# Altium PCB all_Masterboard_2020.PcbDoc
Units mm, origin at the board's own origin, x right, y up, seen from the top; angles counter-clockwise.
Board outline 150 x 100 mm, 8 copper layers (Top Layer, GND1, SIG1, SIG2, GND2, SIG3, PWR, Bottom Layer), stack 1.535 mm thick; 173 components, 178 nets, 1386 pads, 5 vias.
Unrouted connection lines stored in the file: 631.
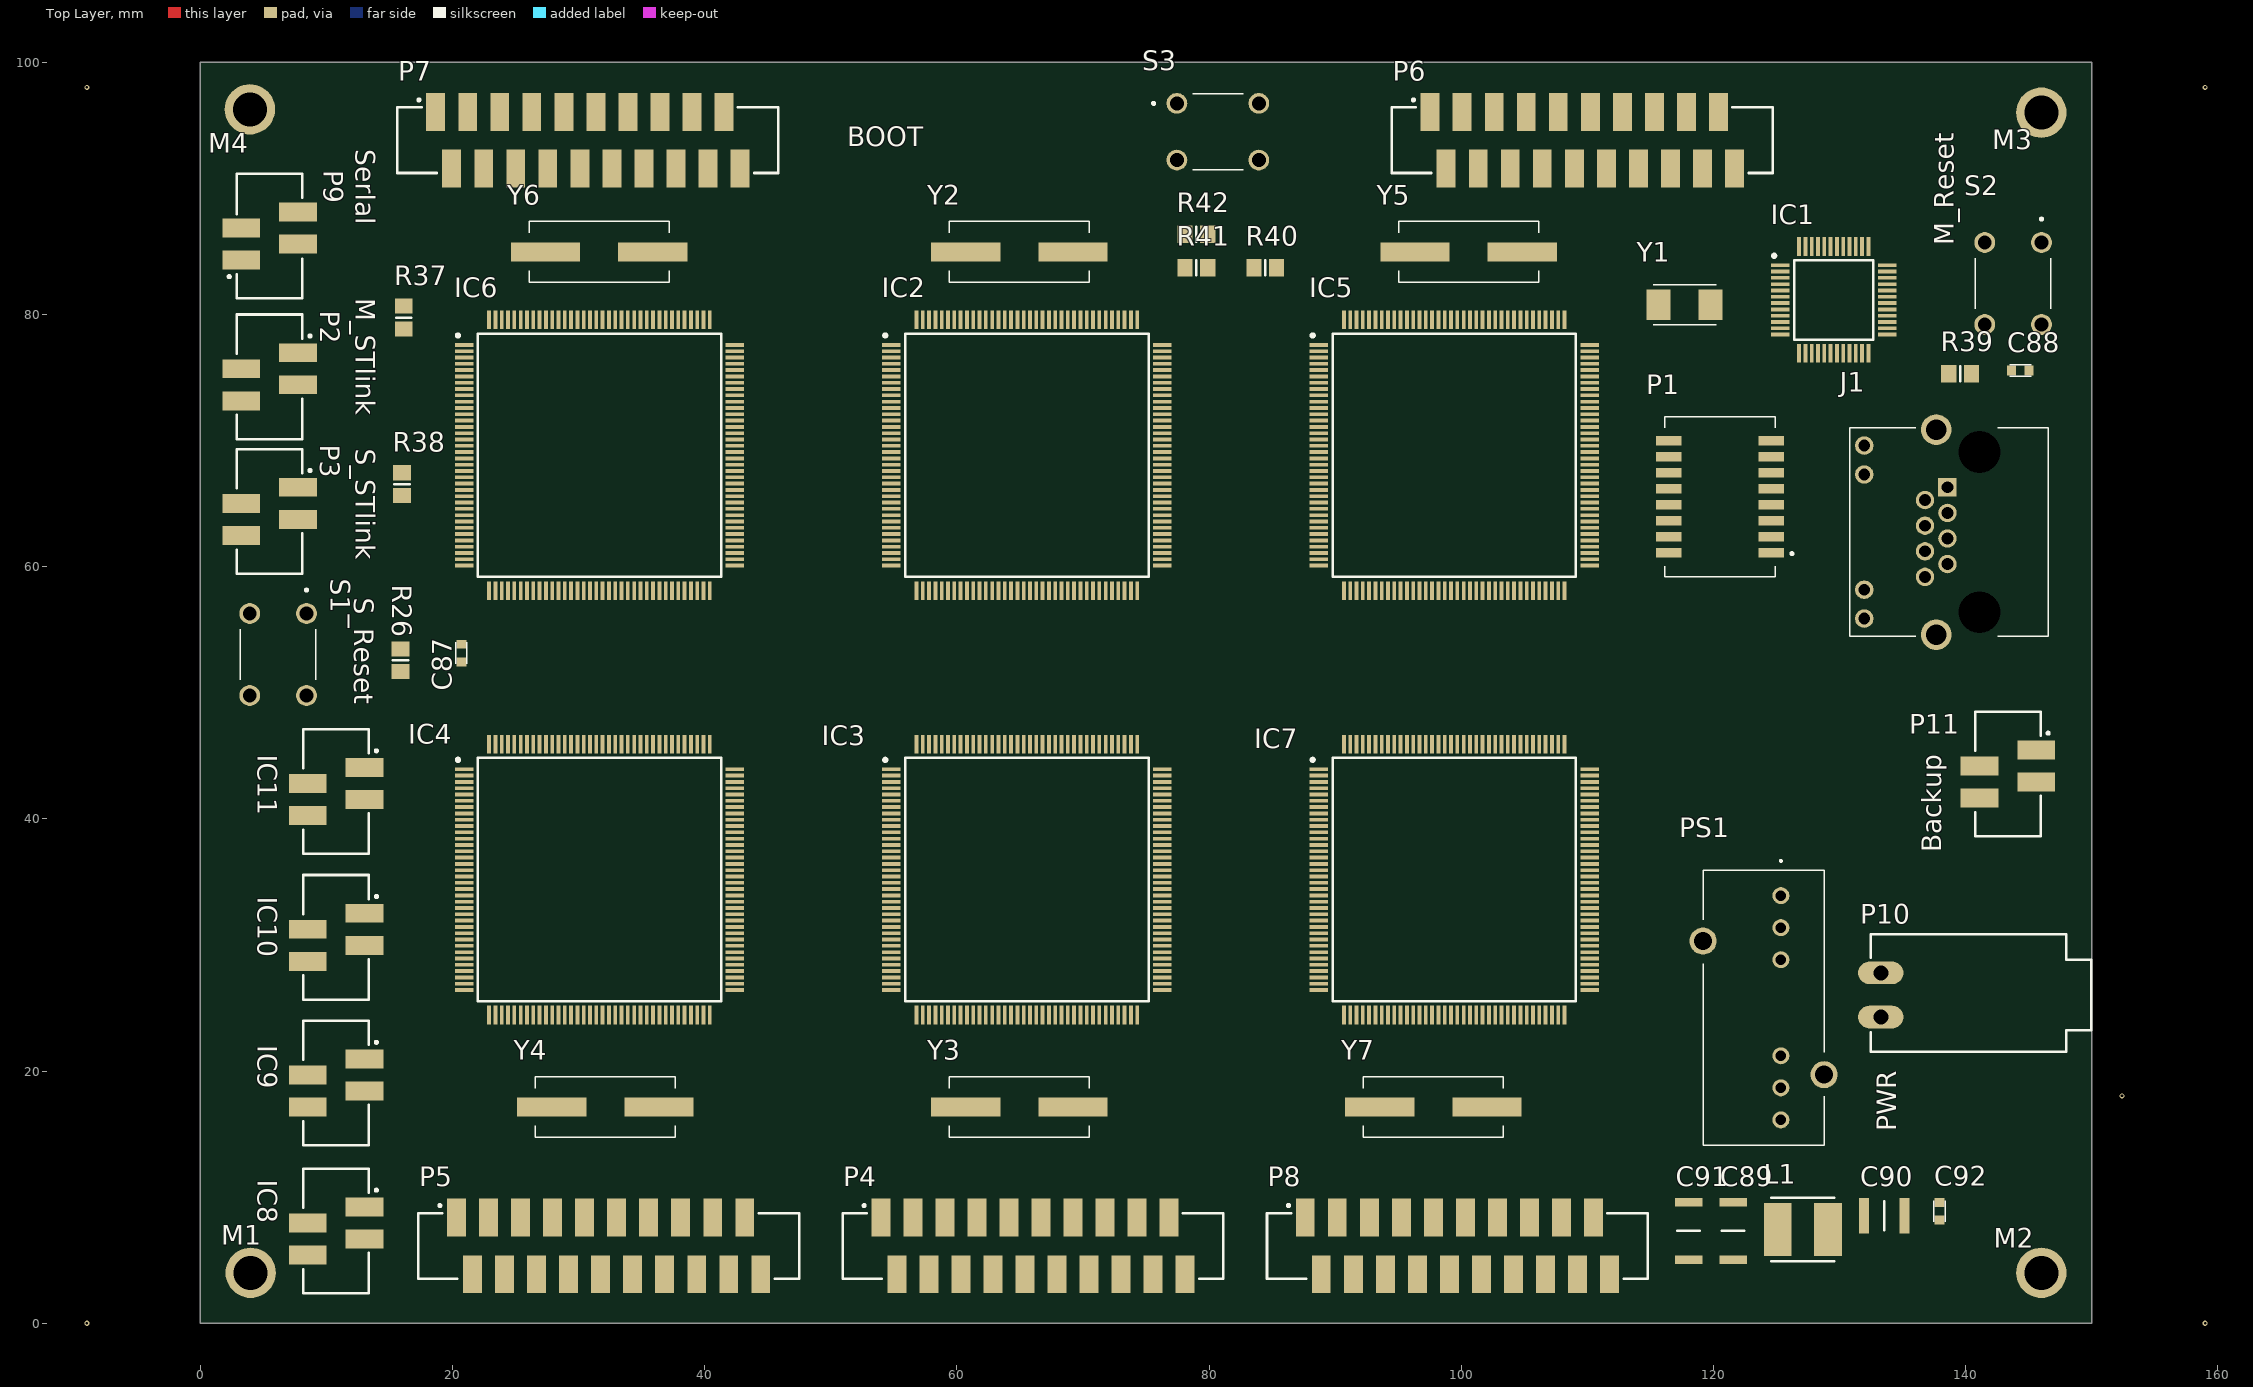
[diagram p0: Top Layer view]
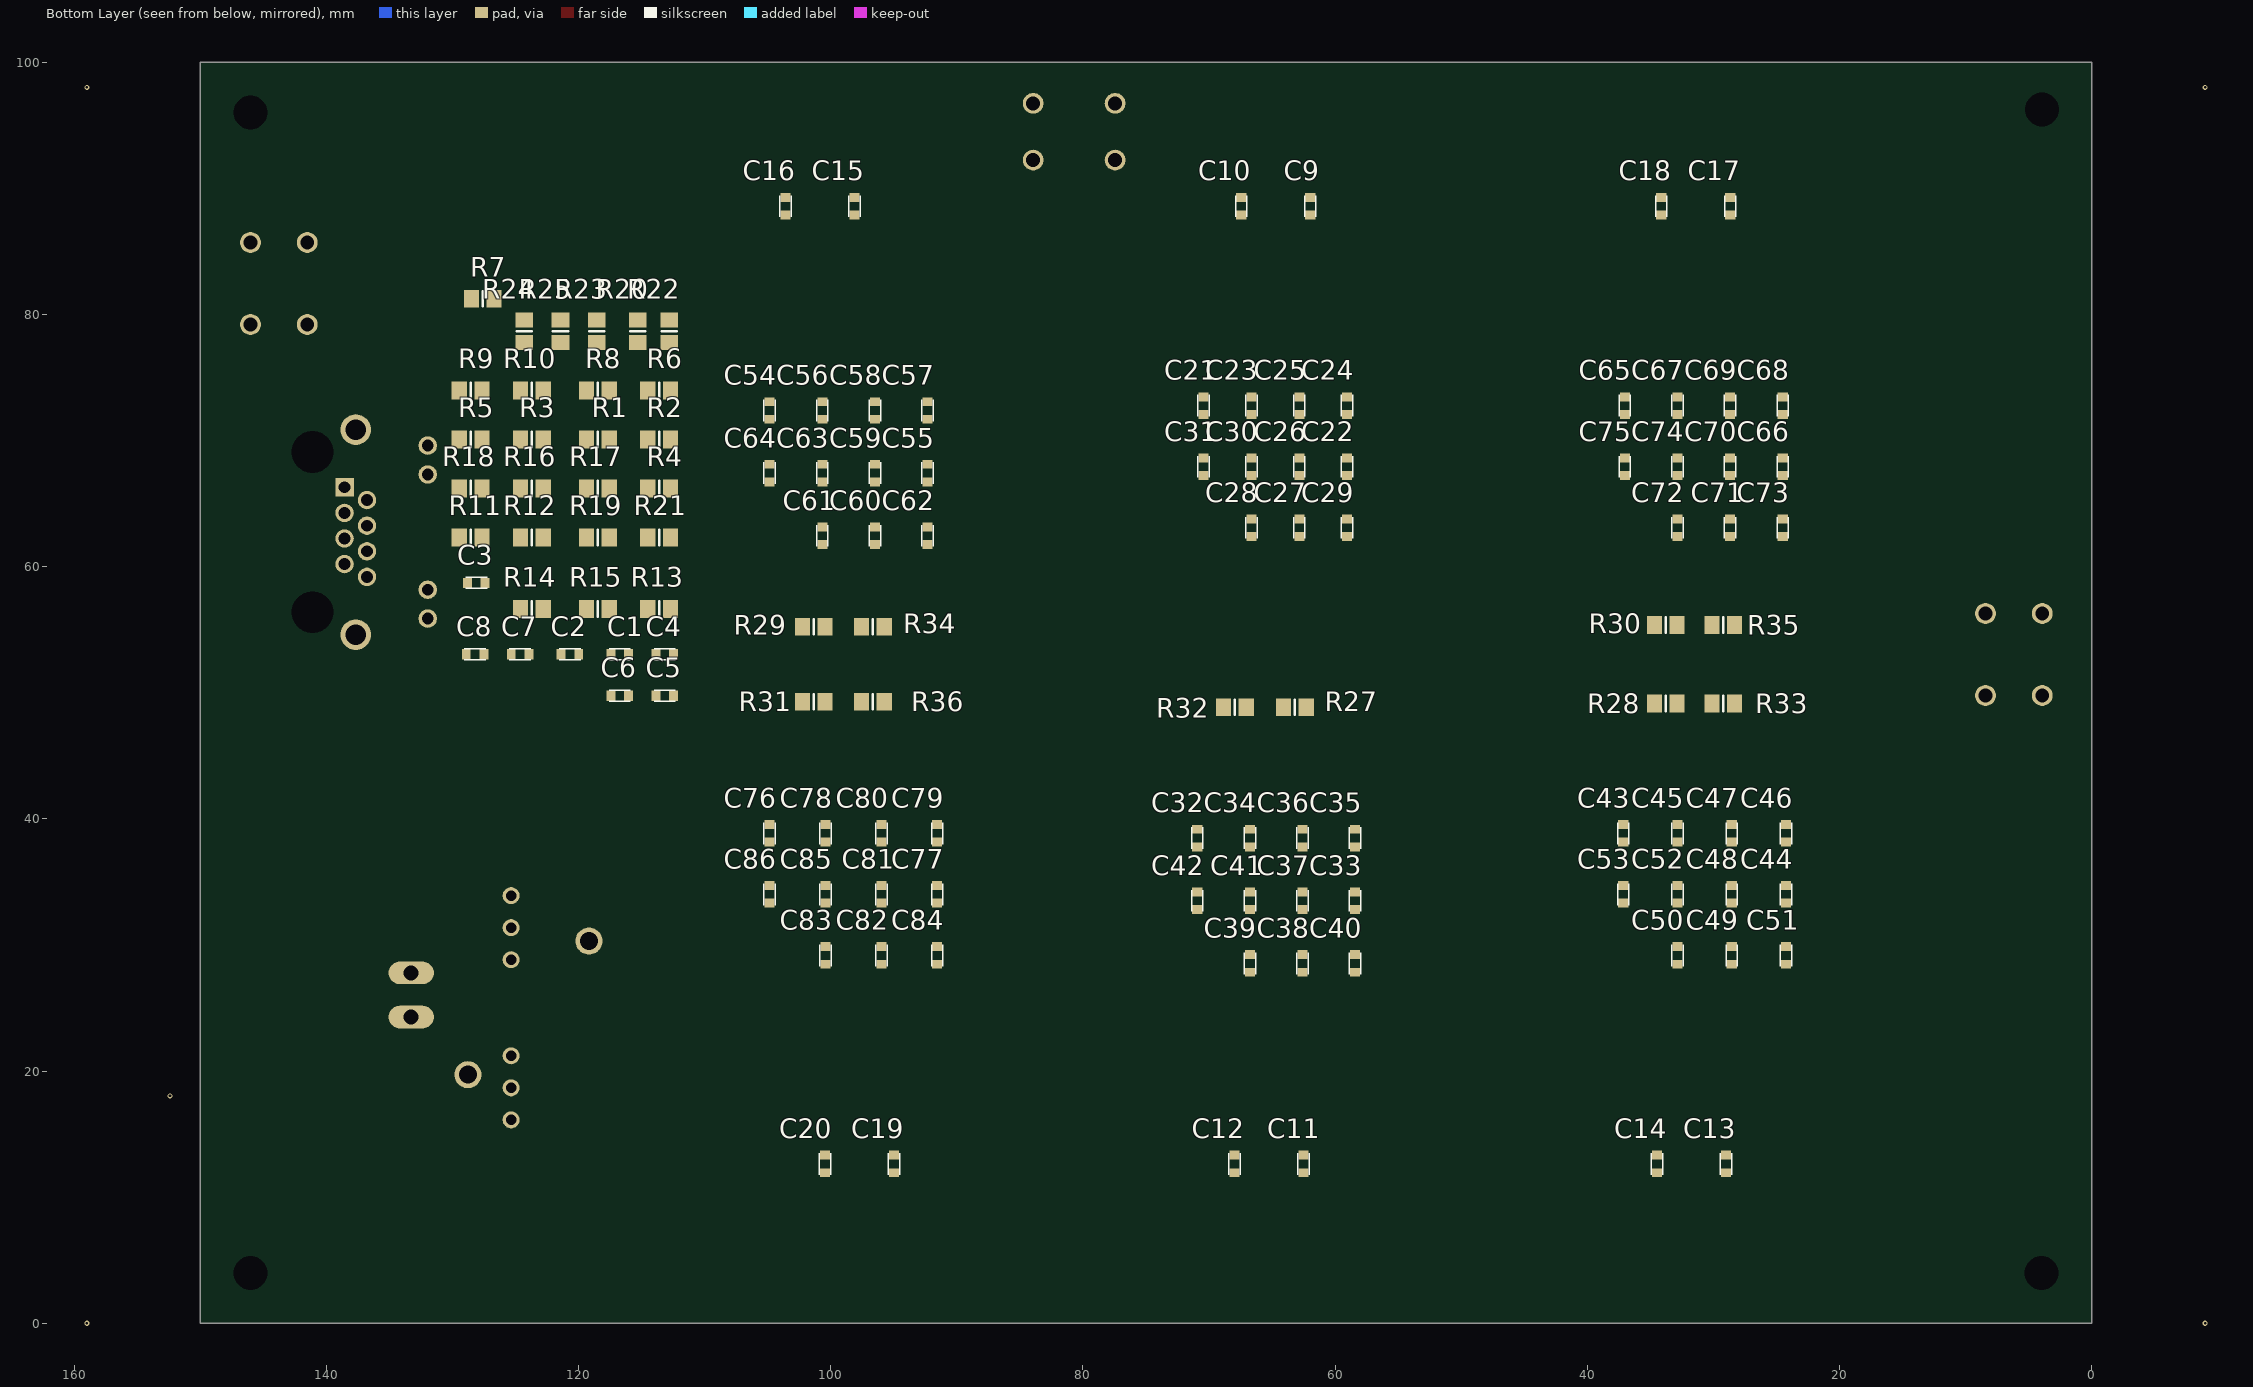
[diagram p1: Bottom Layer view, seen from below]
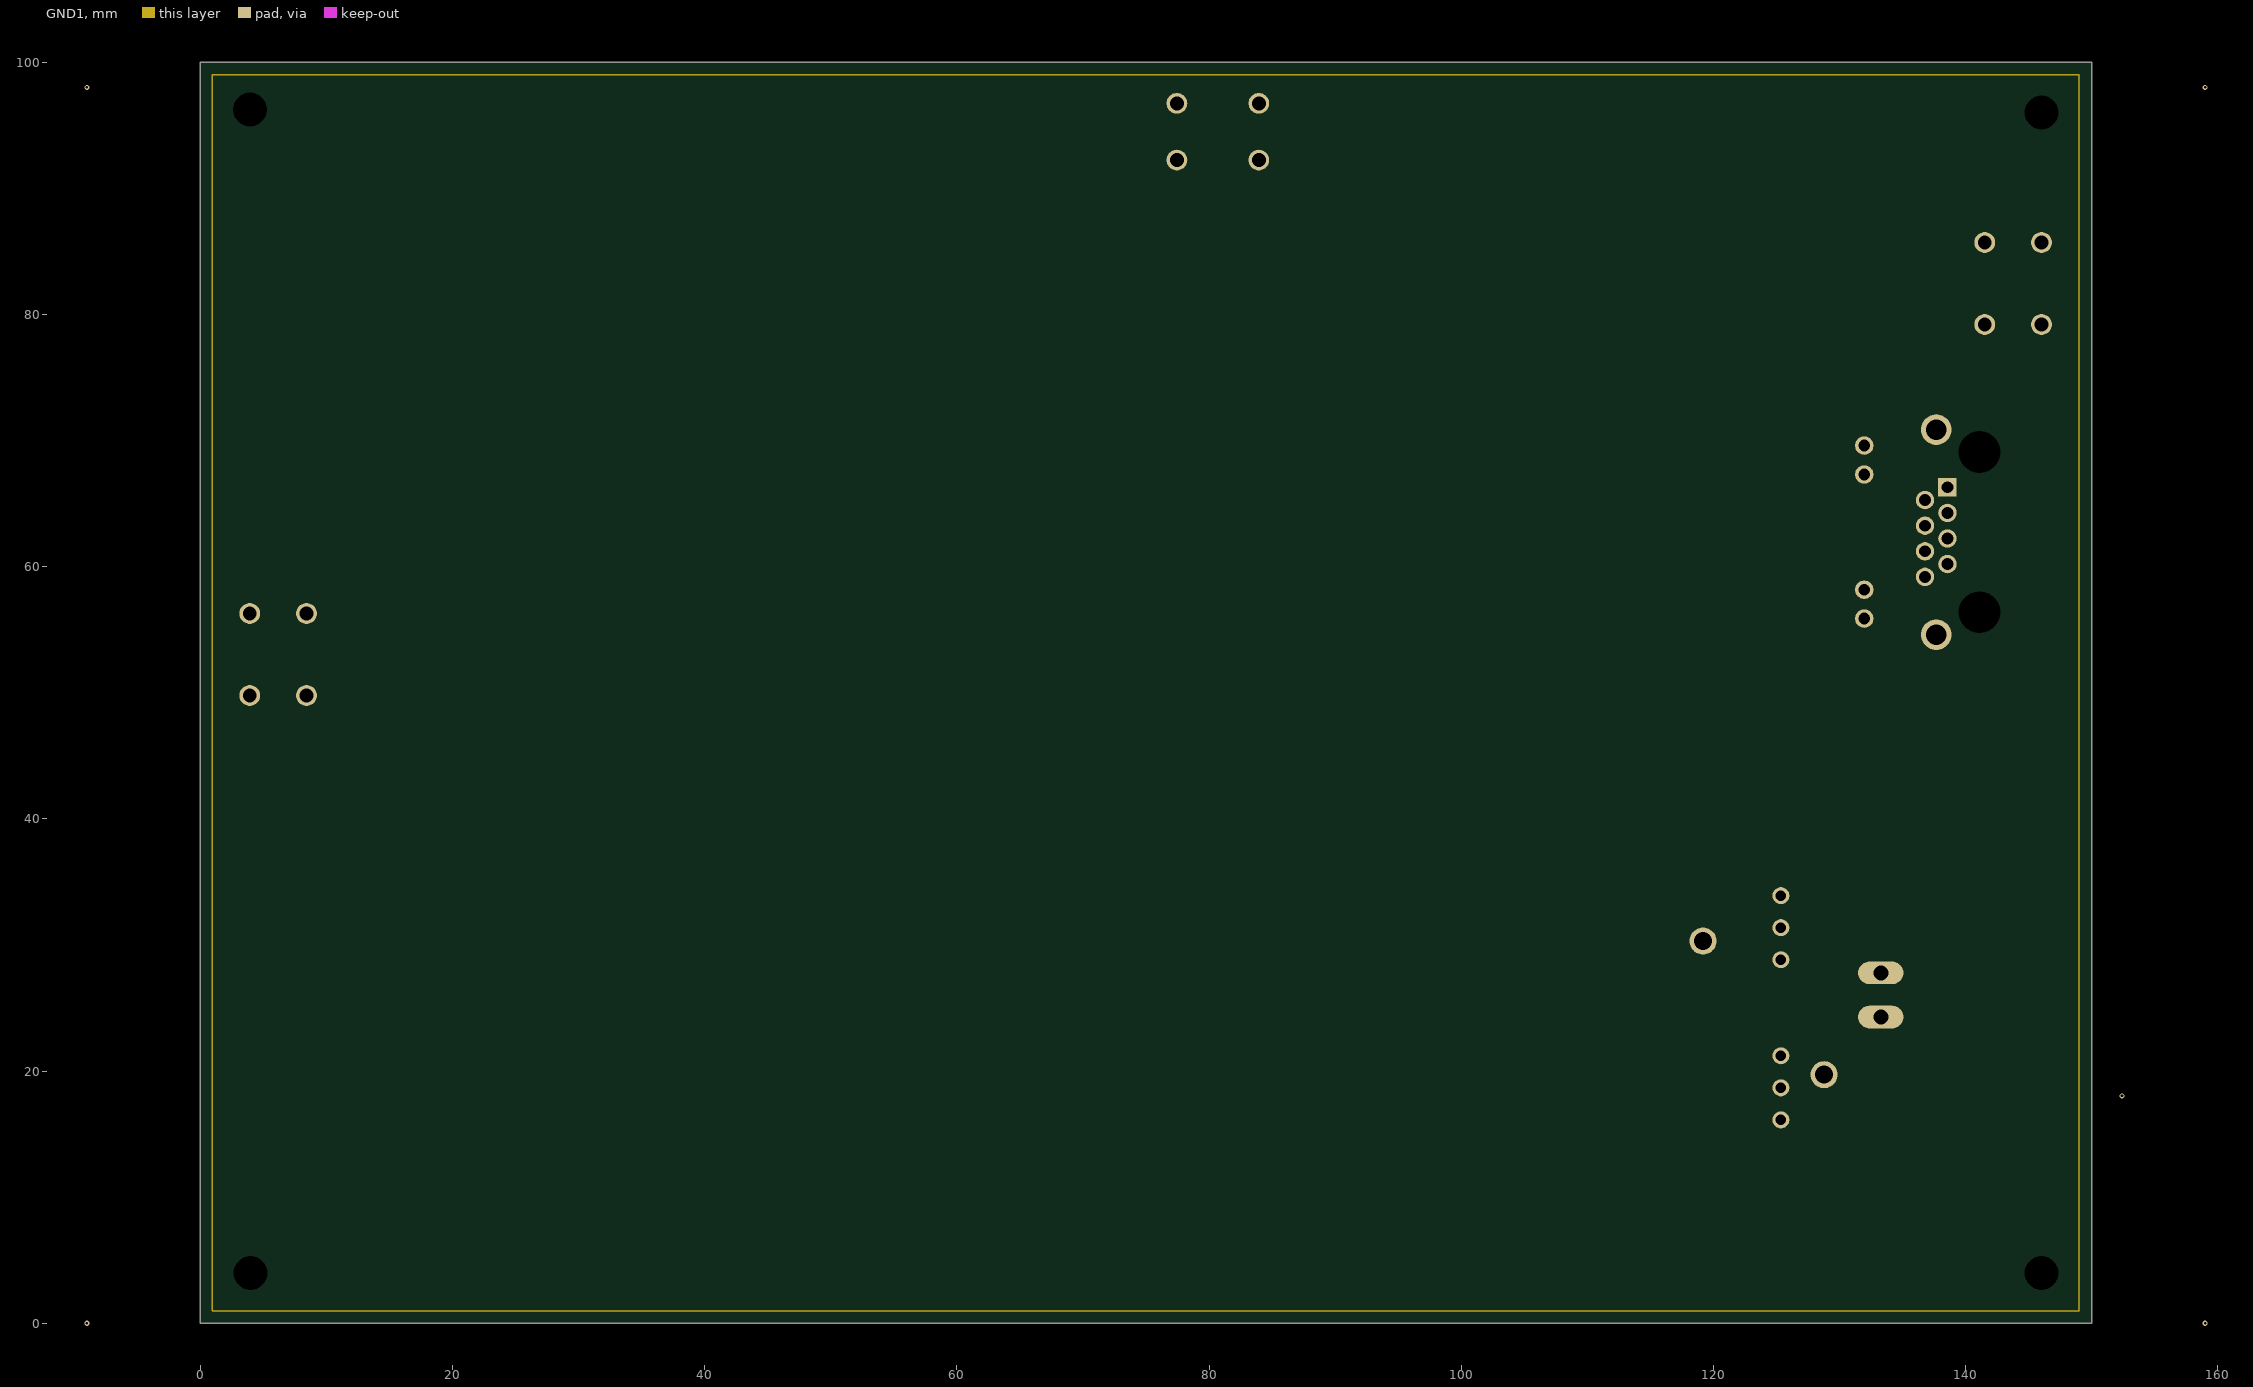
[diagram p2: GND1]
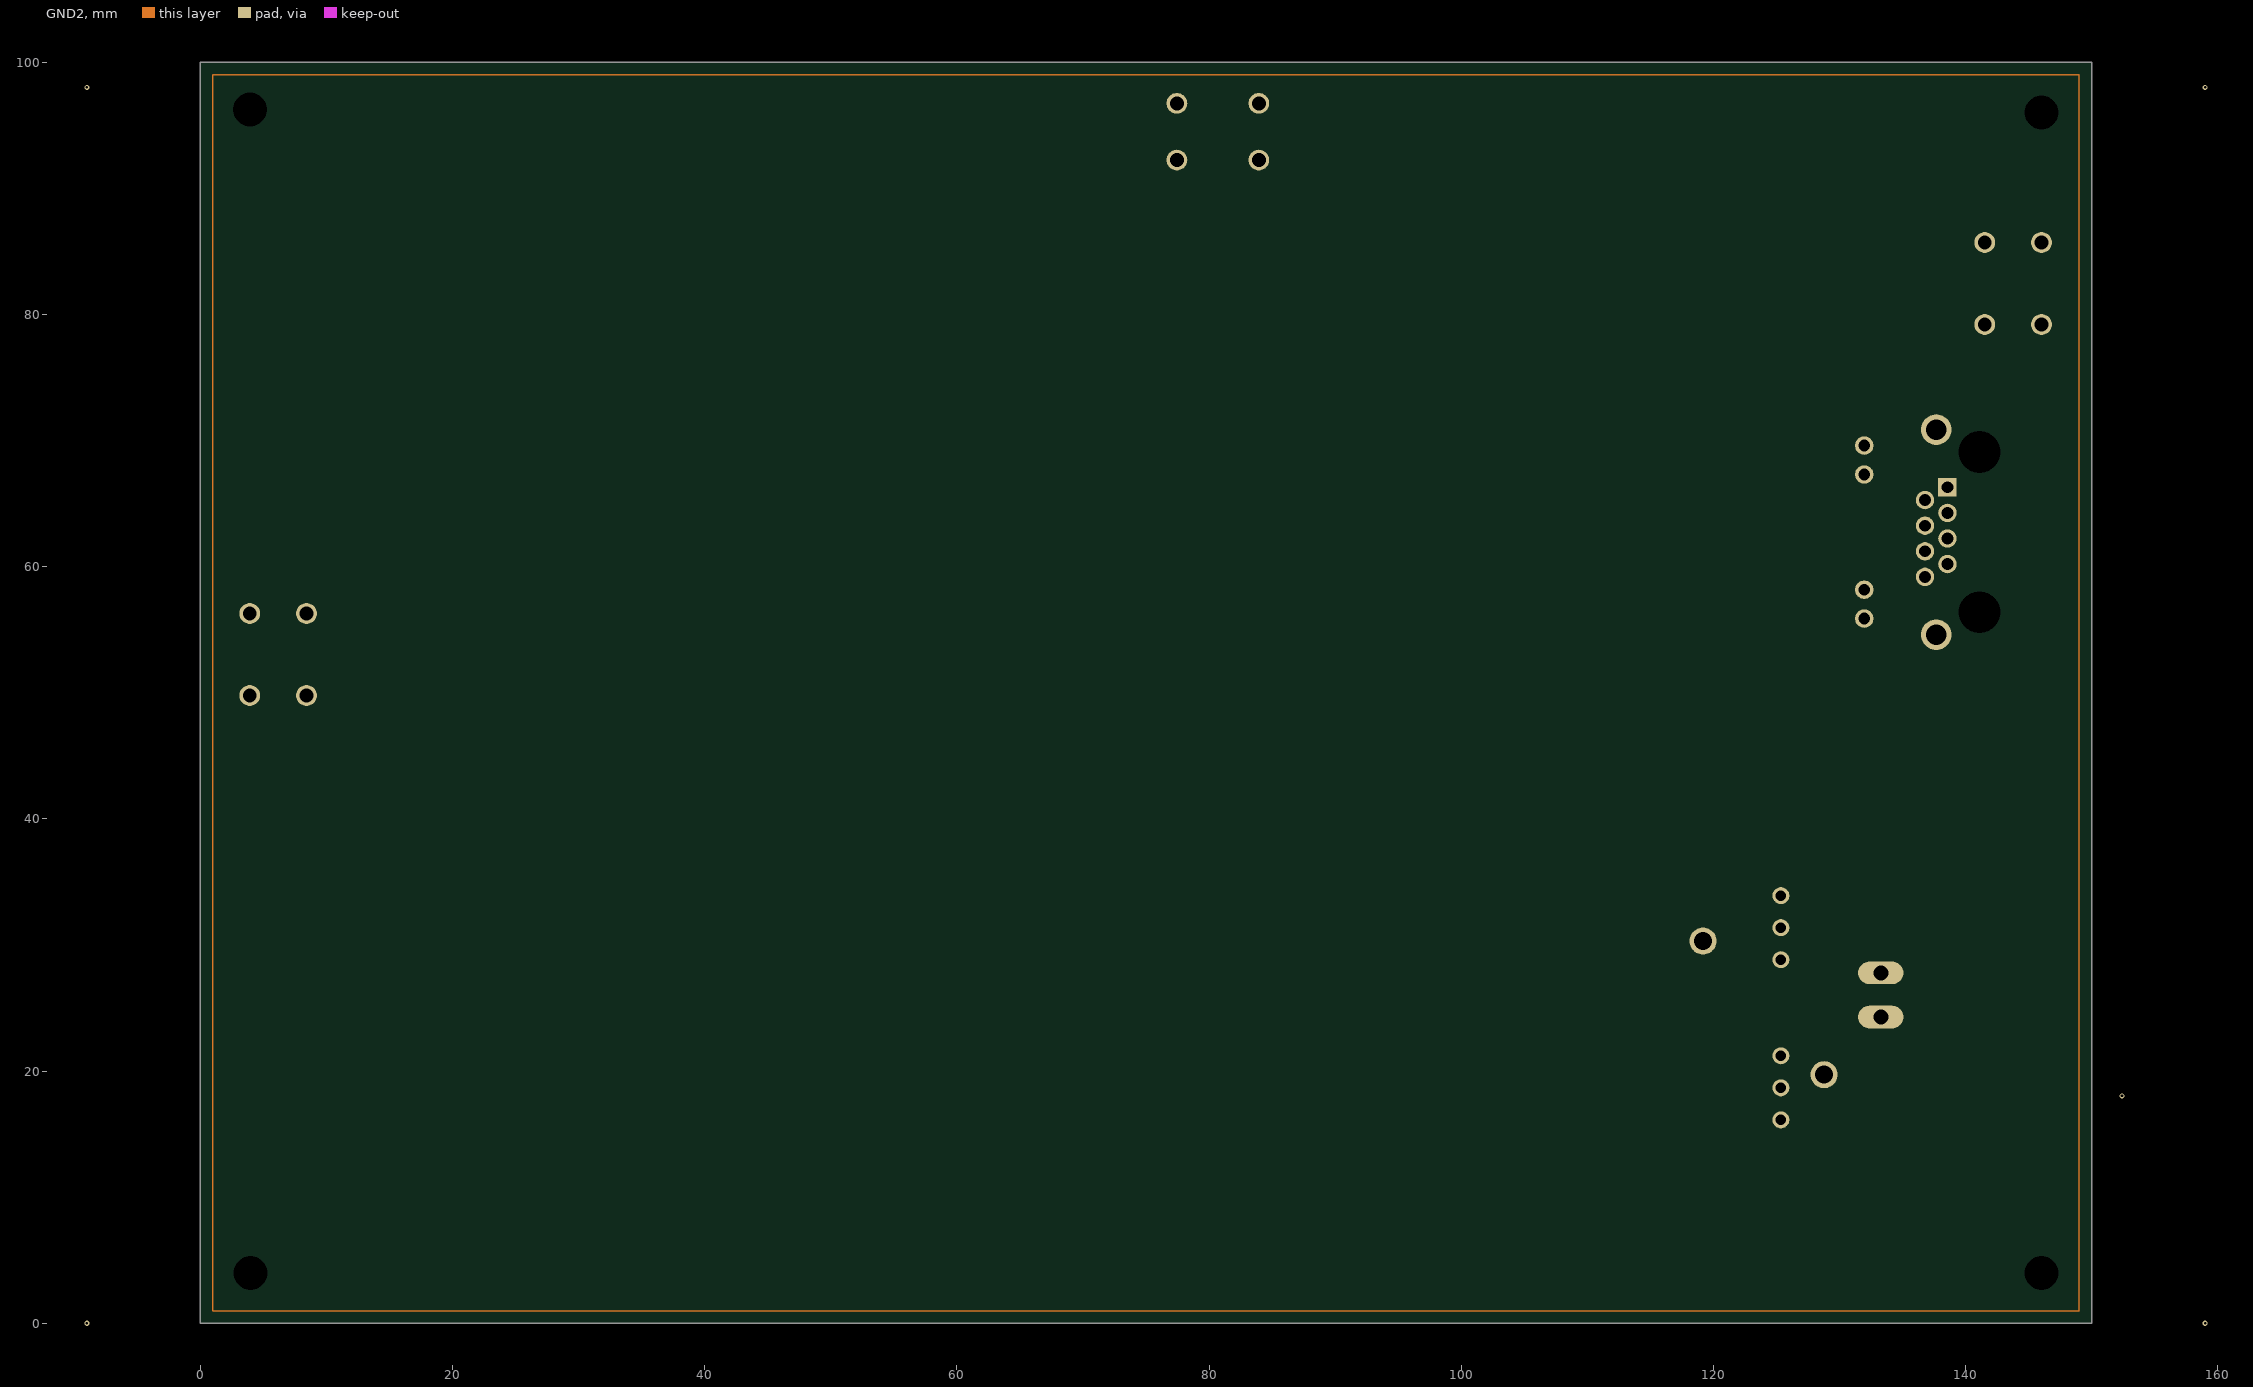
[diagram p3: GND2]
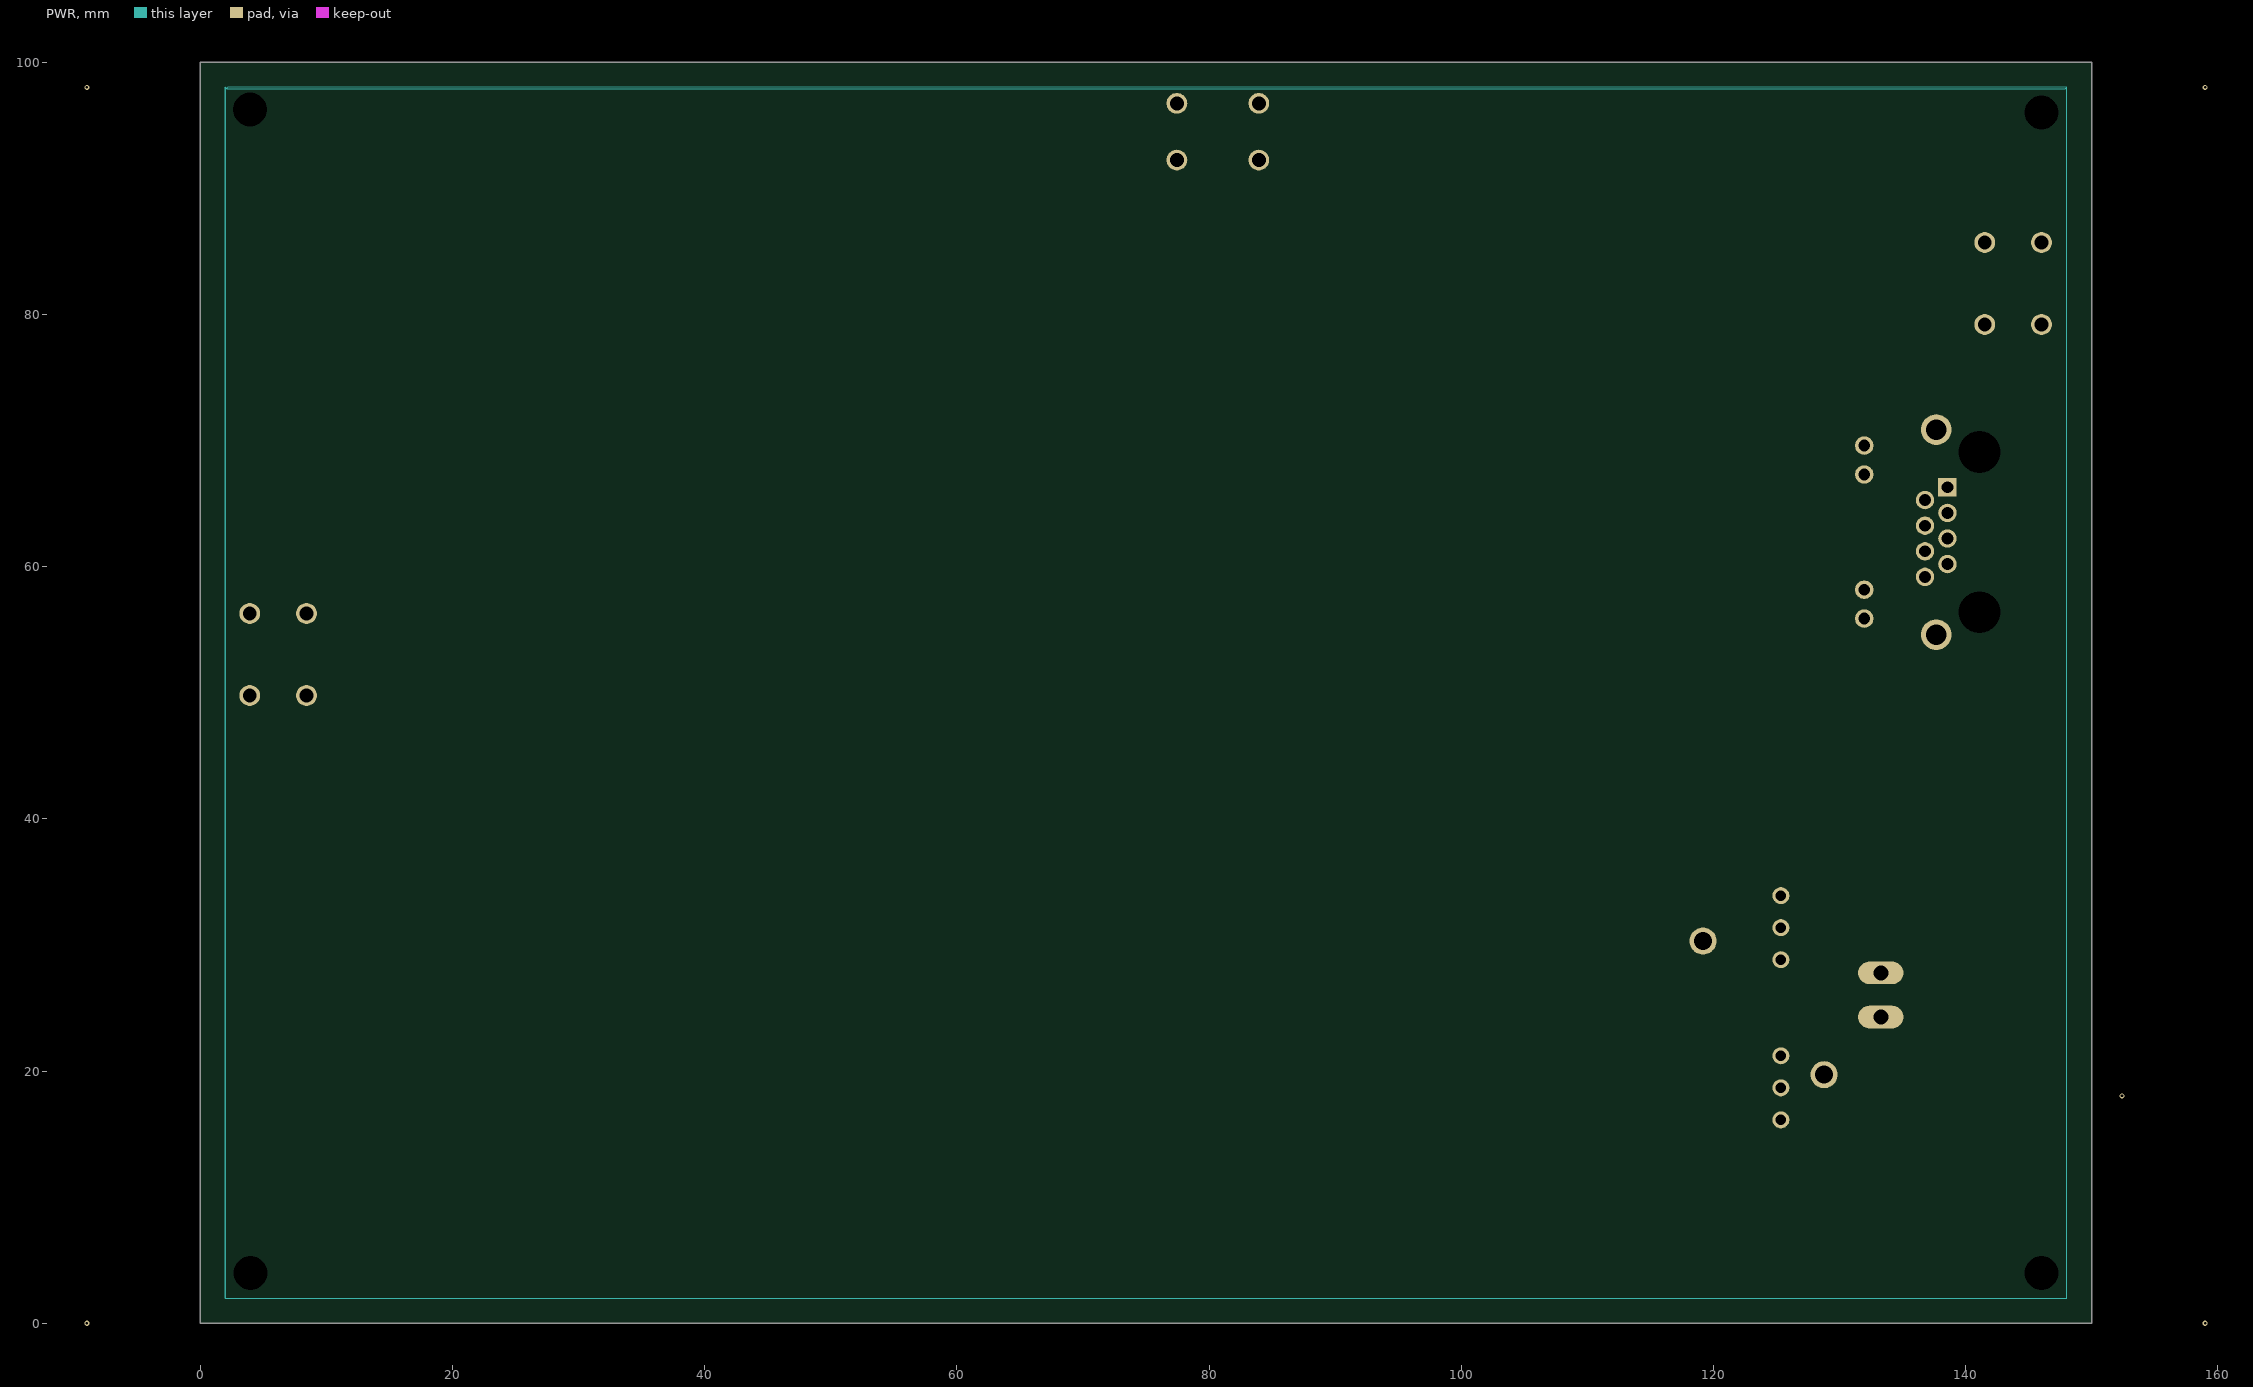
[diagram p4: PWR]

## Layer stack, top to bottom
Top Solder: solder mask 0.0254, SM-001, Dk 4
Top Layer: signal copper 0.035
Dielectric 1: prepreg 0.0711, PP-006, Dk 4.1
Dielectric 2: prepreg 0.0711, PP-006, Dk 4.1
GND1: signal copper 0.035
Dielectric 3: core 0.2286, Core-027, Dk 4.5
SIG1: signal copper 0.035
Dielectric 4: prepreg 0.0711, PP-006, Dk 4.1
Dielectric 5: prepreg 0.0711, PP-006, Dk 4.1
SIG2: signal copper 0.035
Dielectric 6: core 0.2286, Core-027, Dk 4.5
GND2: signal copper 0.035
Dielectric 7: prepreg 0.0711, PP-006, Dk 4.1
Dielectric 8: prepreg 0.0711, PP-006, Dk 4.1
SIG3: signal copper 0.035
Dielectric 9: core 0.2286, Core-027, Dk 4.5
PWR: signal copper 0.035
Dielectric 10: prepreg 0.0711, PP-006, Dk 4.1
Dielectric 11: prepreg 0.0711, PP-006, Dk 4.1
Bottom Layer: signal copper 0.035
Bottom Solder: solder mask 0.0254, SM-001, Dk 4

## Board outline
150,0 0,0 0,100 150,100

## Design rules (kind name [scope] priority, off if disabled: settings)
Clearance All [All] p1: gap=0.152 ignorepadtopadclearanceinfootprint=TRUE except(0: Arc-Hole Track-Hole SMDPad-Hole THPad-Hole Via-Hole Fill-Hole Poly-Hole Region-Hole Text-Hole)
PlaneClearance [All] p1: clearance=0.203
PlaneConnect [All] p1: planeconnectstyle=Relief reliefexpansion=0.152 reliefentries=4 reliefconductorwidth=0.254 reliefairgap=0.203
PolygonConnect [All] p1: connectstyle=Relief reliefconductorwidth=0.254 reliefentries=4 polygonreliefangle="90 Angle" airgapwidth=0.254
PolygonConnect PolygonConnect_Via [IsVia] p2: connectstyle=Direct reliefconductorwidth=0.254 reliefentries=4 polygonreliefangle="90 Angle" airgapwidth=0.254
RoutingVias [All] p1: holewidth=0.2 width=0.4 viastyle="Through Hole" minholewidth=0.2 minwidth=0.4 maxholewidth=0.2 maxwidth=0.4
SolderMaskExpansion [All] p1: expansion=0.102 istentingtop=FALSE
Width Diff_pair [(InDifferentialPairClass('100'))] p1: maxlimit=0.114 minlimit=0.114 preferedwidth=0.114
Width Width_1 [All] p2: maxlimit=1.524 minlimit=0.152 preferedwidth=0.152 midlayer5_maxwidth=0.152 midlayer6_maxwidth=0.152 minimp=50.000000 maximp=50.000000 favimp=50.000000
Width PWR [InNetClass('PWR')] p3: maxlimit=1.524 minlimit=0.254 preferedwidth=0.305
28 further rules are at their usual default settings.

## Components (designator, comment, footprint, x,y, rotation, side; value= is the part's Value field where it differs from the comment)
C1 "10nF" C0603 117.434,53.051 r180 bottom
C2 "Tụ điện dán 080522nF" C0603 121.385,53.051 r180 bottom value=22nF
C3 "10nF" C0603 128.808,58.718 r180 bottom value=6.8nF
C4 "10nF" C0603 113.864,53.051 r180 bottom value=6.8nF
C5 "Tụ điện dán 080518pF" C0603 113.864,49.765 r180 bottom value=18pF
C6 "Tụ điện dán 080518pF" C0603 117.434,49.765 r180 bottom value=18pF
C7 "100pF" C0603 125.336,53.051 r180 bottom value=4.7uF
C8 "Tụ điện dán 08054.7nF" C0603 128.906,53.051 r180 bottom value=4.7nF
C9 "30pF" c0603 61.976,89.281 r270 bottom
C10 "30pF" c0603 67.449,87.881 r90 bottom
C11 "30pF" c0603 62.507,11.935 r90 bottom
C12 "30pF" c0603 67.98,11.935 r90 bottom
C13 "30pF" c0603 29.002,11.935 r90 bottom
C14 "30pF" c0603 34.475,11.935 r90 bottom
C15 "30pF" c0603 98.113,87.881 r90 bottom
C16 "30pF" c0603 103.586,87.881 r90 bottom
C17 "30pF" c0603 28.667,87.881 r90 bottom
C18 "30pF" c0603 34.14,87.881 r90 bottom
C19 "30pF" c0603 94.984,11.935 r90 bottom
C20 "30pF" c0603 100.457,11.935 r90 bottom
C21 "100nF" C0603 70.429,72.064 r90 bottom
C22 "100nF" C0603 59.047,67.224 r90 bottom
C23 "100nF" C0603 66.635,72.064 r90 bottom
C24 "100nF" C0603 59.047,72.064 r90 bottom
C25 "100nF" C0603 62.841,72.064 r90 bottom
C26 "100nF" C0603 62.841,67.224 r90 bottom
C27 "100nF" C0603 62.841,62.384 r90 bottom
C28 "100nF" C0603 66.635,62.384 r90 bottom
C29 "100nF" C0603 59.047,62.384 r90 bottom
C30 "100nF" C0603 66.635,67.224 r90 bottom
C31 "100nF" C0603 70.429,67.224 r90 bottom
C32 "100nF" C0603 70.937,37.774 r90 bottom
C33 "100nF" C0603 58.412,32.807 r90 bottom
C34 "100nF" C0603 66.762,37.774 r90 bottom
C35 "100nF" C0603 58.412,37.774 r90 bottom
C36 "100nF" C0603 62.587,37.774 r90 bottom
C37 "100nF" C0603 62.587,32.807 r90 bottom
C38 "100nF" C0603 62.587,27.84 r90 bottom
C39 "100nF" C0603 66.762,27.84 r90 bottom
C40 "100nF" C0603 58.412,27.84 r90 bottom
C41 "100nF" C0603 66.762,32.807 r90 bottom
C42 "100nF" C0603 70.937,32.807 r90 bottom
C43 "100nF" C0603 37.155,38.155 r90 bottom
C44 "100nF" C0603 24.249,33.315 r90 bottom
C45 "100nF" C0603 32.853,38.155 r90 bottom
C46 "100nF" C0603 24.249,38.155 r90 bottom
C47 "100nF" C0603 28.551,38.155 r90 bottom
C48 "100nF" C0603 28.551,33.315 r90 bottom
C49 "100nF" C0603 28.551,28.475 r90 bottom
C50 "100nF" C0603 32.853,28.475 r90 bottom
C51 "100nF" C0603 24.249,28.475 r90 bottom
C52 "100nF" C0603 32.853,33.315 r90 bottom
C53 "100nF" C0603 37.155,33.315 r90 bottom
C54 "100nF" C0603 104.846,71.683 r90 bottom
C55 "100nF" C0603 92.321,66.716 r90 bottom
C56 "100nF" C0603 100.671,71.683 r90 bottom
C57 "100nF" C0603 92.321,71.683 r90 bottom
C58 "100nF" C0603 96.496,71.683 r90 bottom
C59 "100nF" C0603 96.496,66.716 r90 bottom
C60 "100nF" C0603 96.496,61.749 r90 bottom
C61 "100nF" C0603 100.671,61.749 r90 bottom
C62 "100nF" C0603 92.321,61.749 r90 bottom
C63 "100nF" C0603 100.671,66.716 r90 bottom
C64 "100nF" C0603 104.846,66.716 r90 bottom
C65 "100nF" C0603 37.028,72.064 r90 bottom
C66 "100nF" C0603 24.503,67.224 r90 bottom
C67 "100nF" C0603 32.853,72.064 r90 bottom
C68 "100nF" C0603 24.503,72.064 r90 bottom
C69 "100nF" C0603 28.678,72.064 r90 bottom
C70 "100nF" C0603 28.678,67.224 r90 bottom
C71 "100nF" C0603 28.678,62.384 r90 bottom
C72 "100nF" C0603 32.853,62.384 r90 bottom
C73 "100nF" C0603 24.503,62.384 r90 bottom
C74 "100nF" C0603 32.853,67.224 r90 bottom
C75 "100nF" C0603 37.028,67.224 r90 bottom
C76 "100nF" C0603 104.846,38.155 r90 bottom
C77 "100nF" C0603 91.559,33.315 r90 bottom
C78 "100nF" C0603 100.417,38.155 r90 bottom
C79 "100nF" C0603 91.559,38.155 r90 bottom
C80 "100nF" C0603 95.988,38.155 r90 bottom
C81 "100nF" C0603 95.988,33.315 r90 bottom
C82 "100nF" C0603 95.988,28.475 r90 bottom
C83 "100nF" C0603 100.417,28.475 r90 bottom
C84 "100nF" C0603 91.559,28.475 r90 bottom
C85 "100nF" C0603 100.417,33.315 r90 bottom
C86 "100nF" C0603 104.846,33.315 r90 bottom
C87 "100nF" C0603 20.701,52.451 r90 top
C88 "100nF" C0603 145.034,75.565 r180 top
C89 "1nF" C1808 121.558,7.316 r90 top
C90 "10uF" C1210 133.545,8.521 r0 top
C91 "1nF" C1808 118.032,7.316 r90 top
C92 "1nF" C0603 137.93,8.183 r90 top
IC1 "W5500" QFP50P900X900X160-48N 129.54,81.153 r0 top
IC2 "STM32F429ZGT6" QFP50P2200X2200X160-144N 65.55,68.834 r0 top
IC3 "STM32F429ZGT6" QFP50P2200X2200X160-144N 65.55,35.179 r0 top
IC4 "STM32F429ZGT6" QFP50P2200X2200X160-144N 31.658,35.179 r0 top
IC5 "STM32F429ZGT6" QFP50P2200X2200X160-144N 99.441,68.834 r0 top
IC6 "STM32F429ZGT6" QFP50P2200X2200X160-144N 31.658,68.834 r0 top
IC7 "STM32F429ZGT6" QFP50P2200X2200X160-144N 99.441,35.179 r0 top
IC8 "DS18B20+T&R" Conn4pin 10.77,7.32 r90 top
IC9 "DS18B20+T&R" Conn4pin 10.77,19.05 r90 top
IC10 "DS18B20+T&R" Conn4pin 10.77,30.607 r90 top
IC11 "DS18B20+T&R" Conn4pin 10.77,42.164 r90 top
J1 "RJHSE-5381" RJHSE5381 138.559,66.293 r90 top
L1 "Inductor" L1_74404054220 127.094,7.433 r0 top value=22uH
M1 "HOLE2R7-4" HOLE2R7-4#1 4.064,3.937 r0 top
M2 "HOLE2R7-4" HOLE2R7-4#2 145.923,4.064 r0 top
M3 "HOLE2R7-4" HOLE2R7-4#3 146.05,96.012 r0 top
M4 "HOLE2R7-4" HOLE2R7-4#4 3.937,96.266 r0 top
P1 "H2019FNL" H2019FNL 120.524,65.532 r90 top
P2 "MHDR1X4" Conn4pin 5.497,75.057 r90 top
P3 "MHDR1X4" Conn4pin 5.497,64.389 r90 top
P4 "MHDR2X10" conn20pin 66.04,6.132 r180 top
P5 "MHDR2X10" conn20pin 32.385,6.132 r180 top
P6 "MHDR2X10" conn20pin 109.601,93.817 r180 top
P7 "MHDR2X10" conn20pin 30.734,93.817 r180 top
P8 "MHDR2X10" conn20pin 99.695,6.132 r180 top
P9 "MHDR1X4" Conn4pin 5.497,86.233 r270 top
P10 "MHDR1X2" pwrconn 141.224,26.035 r0 top
P11 "MHDR1X4" Conn4pin 143.347,43.561 r90 top
PS1 "TMR 6-2410WIR" TMR62410WIR 125.349,33.909 r270 top
R1 "1K" 6-0805_N 118.47,70.084 r180 bottom
R2 "1K" 6-0805_N 113.616,70.084 r180 bottom
R3 "1K" 6-0805_N 123.705,70.084 r180 bottom
R4 "1K" 6-0805_N 113.616,66.195 r180 bottom
R5 "1K" 6-0805_N 128.559,70.084 r180 bottom
R6 "49R" 6-0805_N 113.616,73.973 r180 bottom value=10R
R7 "10R" 6-0805_N 127.601,81.24 r180 bottom value=49R
R8 "49R" 6-0805_N 118.47,73.973 r180 bottom
R9 "82R" 6-0805_N 128.559,73.973 r180 bottom
R10 "82R" 6-0805_N 123.705,73.973 r180 bottom
R11 "1K" 6-0805_N 128.559,62.306 r180 bottom value=33R
R12 "1K" 6-0805_N 123.705,62.306 r180 bottom
R13 "33R" 6-0805_N 113.616,56.638 r180 bottom
R14 "33R" 6-0805_N 123.705,56.638 r180 bottom
R15 "1K" 6-0805_N 118.47,56.638 r180 bottom
R16 "33R" 6-0805_N 123.705,66.195 r180 bottom
R17 "1M" 6-0805_N 118.47,66.195 r180 bottom
R18 "10K" 6-0805_N 128.559,66.195 r180 bottom
R19 "1K" 6-0805_N 118.47,62.306 r180 bottom
R20 "75R" 6-0805_N 115.308,78.662 r90 bottom
R21 "75R" 6-0805_N 113.616,62.306 r180 bottom
R22 "75R" 6-0805_N 112.816,78.662 r90 bottom
R23 "75R" 6-0805_N 118.562,78.662 r90 bottom
R24 "75R" 6-0805_N 124.308,78.662 r90 bottom value=220R
R25 "75R" 6-0805_N 121.435,78.662 r90 bottom value=220R
R26 "10K" 6-0805_N 15.875,52.578 r90 top
R27 "100K" 6-0805_N 63.197,48.855 r180 bottom
R28 "100K" 6-0805_N 29.221,49.149 r0 bottom
R29 "100K" 6-0805_N 96.658,55.245 r0 bottom
R30 "100K" 6-0805_N 29.221,55.372 r0 bottom
R31 "100K" 6-0805_N 101.346,49.276 r180 bottom
R32 "10K" 6-0805_N 67.945,48.855 r180 bottom
R33 "10K" 6-0805_N 33.782,49.149 r0 bottom
R34 "10K" 6-0805_N 101.346,55.245 r0 bottom
R35 "10K" 6-0805_N 33.782,55.372 r0 bottom
R36 "10K" 6-0805_N 96.658,49.276 r180 bottom
R37 "10k" 6-0805_N 16.129,79.756 r90 top
R38 "10k" 6-0805_N 16.002,66.548 r90 top
R39 "10K" 6-0805_N 139.562,75.311 r180 top
R40 "100K" 6-0805_N 84.455,83.693 r180 top
R41 "10K" 6-0805_N 78.994,83.693 r0 top
R42 "10K" 6-0805_N 78.994,86.36 r180 top
S1 "B3F-1025" B3F1025 8.422,56.284 r90 top
S2 "B3F-1025" B3F1025 146.016,85.707 r90 top
S3 "B3F-1025" B3F1025 77.447,96.742 r180 top
Y1 "ABM3-25.000MHZ-B2-T" ABM325000MHZB2T 117.711,80.772 r180 top
Y2 "ATS08ASM-1E" ATS040SM1 64.96,84.963 r180 top
Y3 "ATS08ASM-1E" ATS040SM1 64.96,17.145 r180 top
Y4 "ATS08ASM-1E" ATS040SM1 32.131,17.145 r180 top
Y5 "ATS08ASM-1E" ATS040SM1 100.584,84.963 r180 top
Y6 "ATS08ASM-1E" ATS040SM1 31.623,84.963 r180 top
Y7 "ATS08ASM-1E" ATS040SM1 97.79,17.145 r180 top

## Footprints (in the part's own frame and the unit in brackets; to place one, negate y for a bottom-side part, rotate by r counter-clockwise, add the part's x,y. Pads: shape width x height; smd on the part's side, far side on the other; paste and mask are expansions set on the pad)
6-0805_N [mm] "Chip Resistor, Body 2.0x1.2mm, IPC Medium Density"
  rect 1.2x1.4 smd: 1(-0.9,0) 2(0.9,0)
  silkscreen extent 0,-0.6 0,0.6, body extent -1.07,-0.7 1.07,0.7, height 0.7
ABM325000MHZB2T [mm]
  rect 1.9x2.4 smd: 1(-2.05,0) 2(2.05,0)
  silkscreen extent -2.5,-1.6 2.5,1.6, body extent -2.81,-1.6 2.81,1.6, height 1.4
ATS040SM1 [mm]
  rect 5.5x1.5 smd: 1(-4.25,0) 2(4.25,0)
  silkscreen extent -5.55,-2.41 5.55,2.41, body extent -6.85,-2.41 6.85,2.41, height 4.4
B3F1025 [mm]
  round 1.65 hole 1.1: 1(0,0) 2(-6.5,0) 3(0,4.5) 4(-6.5,4.5)
  silkscreen extent -5.25,-0.75 1.95,5.25, body extent -6.95,-0.75 0.45,5.25, height 5.3
C0603 [mm]
  rect 0.7x0.8 smd paste+0 mask+0.1: 1(0,0) 2(1.4,0)
  silkscreen extent -0.15,-0.45 1.55,0.45, body extent -0.15,-0.45 1.55,0.45, height 0.53
c0603 [mm]
  rect 0.7x0.8 smd paste+0 mask+0.1: 1(0,0) 2(1.4,0)
  silkscreen extent -0.15,-0.45 1.55,0.45, body extent -0.15,-0.45 1.55,0.45, height 0.53
C1210 [mm]
  rect 0.81x2.82 smd: 1(-1.6,0) 2(1.6,0)
  silkscreen extent 0,-1.15 0,1.15, body extent -1.4,-1.22 1.4,1.22, height 1.98
C1808 [mm]
  rect 0.67x2.18 smd: 1(-2.28,0) 2(2.28,0)
  silkscreen extent 0,-0.9 0,0.9, body extent -2.27,-1 2.27,1, height 1.3
Conn4pin [mm]
  rect 1.5x3 smd: 1(1.905,-2.25) 2(0.635,2.25) 3(-0.635,-2.25) 4(-1.905,2.25)
  silkscreen extent -4.94,-3.3 4.94,2.6
conn20pin [mm]
  rect 1.5x3 smd: 1(12.065,-2.25) 2(10.795,2.25) 3(9.525,-2.25) 4(8.255,2.25) 5(6.985,-2.25) 6(5.715,2.25) 7(4.445,-2.25) 8(3.175,2.25) 9(1.905,-2.25) 10(0.635,2.25) 11(-0.635,-2.25) 12(-1.905,2.25) 13(-3.175,-2.25) 14(-4.445,2.25) 15(-5.715,-2.25) 16(-6.985,2.25) 17(-8.255,-2.25) 18(-9.525,2.25) 19(-10.795,-2.25) 20(-12.065,2.25)
  silkscreen extent -15.1,-3.3 15.1,2.6
H2019FNL [mm]
  rect 0.76x2.035 smd: 1(-4.445,-4.063) 2(-3.175,-4.063) 3(-1.905,-4.063) 4(-0.635,-4.063) 5(0.635,-4.063) 6(1.905,-4.063) 7(3.175,-4.063) 8(4.445,-4.063) 9(4.445,4.063) 10(3.175,4.063) 11(1.905,4.063) 12(0.635,4.063) 13(-0.635,4.063) 14(-1.905,4.063) 15(-3.175,4.063) 16(-4.445,4.063)
  silkscreen extent -6.35,-5.8 6.35,4.4, body extent -6.35,-4.4 6.35,4.4, height 6.2
HOLE2R7-4#1 [mm] "HOLE2R7-4"
  round 4 / inner round 1.524 / far side round 1.524 hole 2.7: 1(-0.064,0.063)
HOLE2R7-4#2 [mm] "HOLE2R7-4"
  round 4 / inner round 1.524 / far side round 1.524 hole 2.7: 1(0.077,-0.064)
HOLE2R7-4#3 [mm] "HOLE2R7-4"
  round 4 / inner round 1.524 / far side round 1.524 hole 2.7: 1(-0.05,-0.012)
HOLE2R7-4#4 [mm] "HOLE2R7-4"
  round 4 / inner round 1.524 / far side round 1.524 hole 2.7: 1(0,0)
L1_74404054220 [mm]
  rect 2.2x4.2 smd: 1(-2,0) 2(2,0)
  silkscreen extent -2.5,-2.5 2.5,2.5, body extent -2.5,-2.5 2.5,2.5, height 4
pwrconn [mm]
  oval 3.6x1.8 hole 1.2: 1(-7.95,-1.75) 2(-7.95,1.75)
  silkscreen extent -8.75,-4.5 8.75,4.8
QFP50P900X900X160-48N [mm]
  rect 1.475x0.3 smd: 1(-4.238,2.75) 2(-4.238,2.25) 3(-4.238,1.75) 4(-4.238,1.25) 5(-4.238,0.75) 6(-4.238,0.25) 7(-4.238,-0.25) 8(-4.238,-0.75) 9(-4.238,-1.25) 10(-4.238,-1.75) 11(-4.238,-2.25) 12(-4.238,-2.75) 25(4.238,-2.75) 26(4.238,-2.25) 27(4.238,-1.75) 28(4.238,-1.25) 29(4.238,-0.75) 30(4.238,-0.25) 31(4.238,0.25) 32(4.238,0.75) 33(4.238,1.25) 34(4.238,1.75) 35(4.238,2.25) 36(4.238,2.75)
  rect 0.3x1.475 smd: 13(-2.75,-4.238) 14(-2.25,-4.238) 15(-1.75,-4.238) 16(-1.25,-4.238) 17(-0.75,-4.238) 18(-0.25,-4.238) 19(0.25,-4.238) 20(0.75,-4.238) 21(1.25,-4.238) 22(1.75,-4.238) 23(2.25,-4.238) 24(2.75,-4.238) 37(2.75,4.238) 38(2.25,4.238) 39(1.75,4.238) 40(1.25,4.238) 41(0.75,4.238) 42(0.25,4.238) 43(-0.25,4.238) 44(-0.75,4.238) 45(-1.25,4.238) 46(-1.75,4.238) 47(-2.25,4.238) 48(-2.75,4.238)
  silkscreen extent -4.85,-3.15 3.15,3.62, body extent -4.5,-4.5 4.5,4.5, height 1.6
QFP50P2200X2200X160-144N [mm]
  rect 1.475x0.3 smd: 1(-10.738,8.75) 2(-10.738,8.25) 3(-10.738,7.75) 4(-10.738,7.25) 5(-10.738,6.75) 6(-10.738,6.25) 7(-10.738,5.75) 8(-10.738,5.25) 9(-10.738,4.75) 10(-10.738,4.25) 11(-10.738,3.75) 12(-10.738,3.25) 13(-10.738,2.75) 14(-10.738,2.25) 15(-10.738,1.75) 16(-10.738,1.25) 17(-10.738,0.75) 18(-10.738,0.25) 19(-10.738,-0.25) 20(-10.738,-0.75) 21(-10.738,-1.25) 22(-10.738,-1.75) 23(-10.738,-2.25) 24(-10.738,-2.75) 25(-10.738,-3.25) 26(-10.738,-3.75) 27(-10.738,-4.25) 28(-10.738,-4.75) 29(-10.738,-5.25) 30(-10.738,-5.75) 31(-10.738,-6.25) 32(-10.738,-6.75) 33(-10.738,-7.25) 34(-10.738,-7.75) 35(-10.738,-8.25) 36(-10.738,-8.75) 73(10.738,-8.75) 74(10.738,-8.25) 75(10.738,-7.75) 76(10.738,-7.25) 77(10.738,-6.75) 78(10.738,-6.25) 79(10.738,-5.75) 80(10.738,-5.25) 81(10.738,-4.75) 82(10.738,-4.25) 83(10.738,-3.75) 84(10.738,-3.25) 85(10.738,-2.75) 86(10.738,-2.25) 87(10.738,-1.75) 88(10.738,-1.25) 89(10.738,-0.75) 90(10.738,-0.25) 91(10.738,0.25) 92(10.738,0.75) 93(10.738,1.25) 94(10.738,1.75) 95(10.738,2.25) 96(10.738,2.75) 97(10.738,3.25) 98(10.738,3.75) 99(10.738,4.25) 100(10.738,4.75) 101(10.738,5.25) 102(10.738,5.75) 103(10.738,6.25) 104(10.738,6.75) 105(10.738,7.25) 106(10.738,7.75) 107(10.738,8.25) 108(10.738,8.75)
  rect 0.3x1.475 smd: 37(-8.75,-10.738) 38(-8.25,-10.738) 39(-7.75,-10.738) 40(-7.25,-10.738) 41(-6.75,-10.738) 42(-6.25,-10.738) 43(-5.75,-10.738) 44(-5.25,-10.738) 45(-4.75,-10.738) 46(-4.25,-10.738) 47(-3.75,-10.738) 48(-3.25,-10.738) 49(-2.75,-10.738) 50(-2.25,-10.738) 51(-1.75,-10.738) 52(-1.25,-10.738) 53(-0.75,-10.738) 54(-0.25,-10.738) 55(0.25,-10.738) 56(0.75,-10.738) 57(1.25,-10.738) 58(1.75,-10.738) 59(2.25,-10.738) 60(2.75,-10.738) 61(3.25,-10.738) 62(3.75,-10.738) 63(4.25,-10.738) 64(4.75,-10.738) 65(5.25,-10.738) 66(5.75,-10.738) 67(6.25,-10.738) 68(6.75,-10.738) 69(7.25,-10.738) 70(7.75,-10.738) 71(8.25,-10.738) 72(8.75,-10.738) 109(8.75,10.738) 110(8.25,10.738) 111(7.75,10.738) 112(7.25,10.738) 113(6.75,10.738) 114(6.25,10.738) 115(5.75,10.738) 116(5.25,10.738) 117(4.75,10.738) 118(4.25,10.738) 119(3.75,10.738) 120(3.25,10.738) 121(2.75,10.738) 122(2.25,10.738) 123(1.75,10.738) 124(1.25,10.738) 125(0.75,10.738) 126(0.25,10.738) 127(-0.25,10.738) 128(-0.75,10.738) 129(-1.25,10.738) 130(-1.75,10.738) 131(-2.25,10.738) 132(-2.75,10.738) 133(-3.25,10.738) 134(-3.75,10.738) 135(-4.25,10.738) 136(-4.75,10.738) 137(-5.25,10.738) 138(-5.75,10.738) 139(-6.25,10.738) 140(-6.75,10.738) 141(-7.25,10.738) 142(-7.75,10.738) 143(-8.25,10.738) 144(-8.75,10.738)
  silkscreen extent -11.35,-9.65 9.65,9.65, body extent -11,-11 11,11, height 1.6
RJHSE5381 [mm]
  rect 1.462x1.462 hole 0.94: 1(0,0)
  round 1.462 hole 0.94: 2(-1.015,1.78) 3(-2.03,0) 4(-3.045,1.78) 5(-4.06,0) 6(-5.075,1.78) 7(-6.09,0) 8(-7.105,1.78) 9(3.308,6.6) 10(1.017,6.6) 11(-8.123,6.6) 12(-10.413,6.6)
  round 2.43 hole 1.62: MH1(4.578,0.89) MH2(-11.683,0.89)
  round 1.65 hole 3.3 unplated: MH3(2.798,-2.54) MH4(-9.902,-2.54)
  silkscreen extent -11.81,-8 4.7,7.75, body extent -12.39,-8 5.29,7.75, height 16.07
TMR62410WIR [mm]
  round 1.349 hole 0.83: 1(0,0) 2(2.54,0) 3(5.08,0) 6(12.7,0) 7(15.24,0) 8(17.78,0)
  round 2.145 hole 1.43: 9(3.6,-6.175) 10(14.2,3.425)
  silkscreen extent -2.8,-6.17 19.8,3.42, body extent -2.12,-5.95 19.72,3.75, height 14.7

## Part data
C1 C2 C3 C4 C5 C6 C8: library part "CAP NP", "Capacitor non polarized", cm1="Tụ điện dán 0603", cm2="Tụ điện dán 0805", cm3="Tụ điện dán 1206"
C7: library part Cap, "Capacitor", LatestRevisionDate=17-Jul-2002, LatestRevisionNote="Re-released for DXP Platform.", PackageDescription="Radial Cap, Thru-Hole; 2 Leads; 0.3 in Pin Spacing", PackageReference=RAD-0.3, Published=8-Jun-2000, Publisher="Altium Limited"
C9 C10 C11 C12 C13 C14 C15 C16 C17 C18 C19 C20: library part CP1
C21 C22 C23 C24 C25 C26 C27 C28 C29 C30 C31 C32 C33 C34 C35 C36 C37 C38 C39 C40 C41 C42 C43 C44 C45 C46 C47 C48 C49 C50 C51 C52 C53 C54 C55 C56 C57 C58 C59 C60 C61 C62 C63 C64 C65 C66 C67 C68 C69 C70 C71 C72 C73 C74 C75 C76 C77 C78 C79 C80 C81 C82 C83 C84 C85 C86: library part Cap_0805
C87 C88 C89 C90 C91 C92: library part C
IC1: "Integrated Circuit", Manufacturer_Name="Wiznet Technology", Arrow Part Number=W5500, Arrow Price/Stock=https://www.arrow.com/en/products/w5500/wiznet, Datasheet Link=https://www.arrow.com/en/products/w5500/wiznet, Height=1.6mm, Manufacturer_Part_Number=W5500
IC2 IC3 IC4 IC5 IC6 IC7: "Integrated Circuit", Manufacturer_Name=STMicroelectronics, Mouser Part Number=511-STM32F429ZGT6, Arrow Part Number=STM32F429ZGT6, Arrow Price/Stock=https://www.arrow.com/en/products/stm32f429zgt6/stmicroelectronics, Datasheet Link=http://www.st.com/web/en/resource/technical/document/datasheet/DM00071990.pdf, Height=1.6mm, Manufacturer_Part_Number=STM32F429ZGT6, Mouser Price/Stock=https://www.mouser.co.uk/ProductDetail/STMicroelectronics/STM32F429ZGT6?qs=DqCdCwOw4%2F61O51evUvYMQ%3D%3D
IC8 IC9 IC10 IC11: "Integrated Circuit", Manufacturer_Name="Maxim Integrated", Mouser Part Number=700-DS18B20T&R, Datasheet Link=https://componentsearchengine.com/Datasheets/1/DS18B20+T&R.pdf, Height=10.41mm, Manufacturer_Part_Number=DS18B20+T&R, Mouser Price/Stock=https://www.mouser.co.uk/ProductDetail/Maxim-Integrated/DS18B20%2bTR/?qs=7H2Jq%252ByxpJKpIDCbiq4lfg%3D%3D
P2 P3 P9 P11: "Header, 4-Pin", LatestRevisionDate=17-Jul-2002, LatestRevisionNote="Re-released for DXP Platform.", Publisher="Altium Limited"
P4 P5 P6 P7 P8: "Header, 10-Pin, Dual row", LatestRevisionDate=17-Jul-2002, LatestRevisionNote="Re-released for DXP Platform.", Publisher="Altium Limited"
P10: "Header, 2-Pin", LatestRevisionDate=17-Jul-2002, LatestRevisionNote="Re-released for DXP Platform.", Publisher="Altium Limited"
PS1: "DCDC Wandler"
R1 R2 R3 R4 R5 R6 R7 R8 R9 R10 R11 R12 R13 R14 R15 R16 R17 R18 R19 R20 R21 R22 R23 R24 R25: library part Res2, "Resistor", LatestRevisionDate=17-Jul-2002, LatestRevisionNote="Re-released for DXP Platform.", PackageDescription="Axial Device, Thru-Hole; 2 Leads; 0.4 in Pin Spacing", PackageReference=AXIAL-0.4, Published=8-Jun-2000, Publisher="Altium Limited"
R26 R27 R28 R29 R30 R31 R32 R33 R34 R35 R36 R37 R38 R39 R40 R41 R42: library part R
S1 S2 S3: "Switch", Manufacturer_Name="Omron Electronics", Mouser Part Number=653-B3F-1025, Datasheet Link=http://uk.rs-online.com/web/p/products/6821140, Height=5.2mm, Manufacturer_Part_Number=B3F-1025, Mouser Price/Stock=https://www.mouser.co.uk/ProductDetail/Omron-Electronics/B3F-1025?qs=1tDaWCEHQQ7ZoQQuZXPfLw%3D%3D
Y1: "Crystal or Oscillator", Manufacturer_Name=ABRACON, Mouser Part Number=815-ABM3-25-B2-T, Arrow Part Number=ABM3-25.000MHZ-B2-T, Arrow Price/Stock=https://www.arrow.com/en/products/abm3-25.000mhz-b2-t/abracon, Datasheet Link=https://datasheet.datasheetarchive.com/originals/distributors/SFDatasheet-0/sf-000246.pdf, Height=1.3mm, Manufacturer_Part_Number=ABM3-25.000MHZ-B2-T, Mouser Price/Stock=https://www.mouser.co.uk/ProductDetail/ABRACON/ABM3-25000MHZ-B2-T?qs=GgB7MJ%2FTIsQBQ7HNZGW3Hg%3D%3D
Y2 Y3 Y4 Y5 Y6 Y7: "Crystal or Oscillator", Manufacturer_Name=CTS, Mouser Part Number=774-ATS08ASM-1E, Arrow Part Number=ATS08ASM-1E, Arrow Price/Stock=https://www.arrow.com/en/products/ats08asm-1e/cts, Datasheet Link=https://www.ctscorp.com/wp-content/uploads/ATS-ATSSM.pdf, Height=4.3mm, Manufacturer_Part_Number=ATS08ASM-1E, Mouser Price/Stock=https://www.mouser.co.uk/ProductDetail/CTS-Electronic-Components/ATS08ASM-1E/?qs=tjlMjqRIEYSoOC%2FyJ4%2Frjw%3D%3D
L1: SimulationGenericComponent=True

## Via types
v1: diameter 0.4, hole 0.2, Top Layer to Bottom Layer, 5 vias

## Nets (pads, with @x,y where several pads share a name; then routed paths per layer and width w, separated by ;. In a path a pad name is that pad's centre, name@x,y a point inside that pad or via, vN(x,y) a via of type N, cw(c..) or ccw(c..) an arc to the next point about the centre after c; other vN are vias at no path point)
3.3V: C21.1 C22.1 C23.1 C24.1 C25.1 C26.1 C27.1 C28.1 C29.1 C30.1 C31.1 C32.1 C33.1 C34.1 C35.1 C36.1 C37.1 C38.1 C39.1 C40.1 C41.1 C42.1 C43.1 C44.1 C45.1 C46.1 C47.1 C48.1 C49.1 C50.1 C51.1 C52.1 C53.1 C54.1 C55.1 C56.1 C57.1 C58.1 C59.1 C60.1 C61.1 C62.1 C63.1 C64.1 C65.1 C66.1 C67.1 C68.1 C69.1 C70.1 C71.1 C72.1 C73.1 C74.1 C75.1 C76.1 C77.1 C78.1 C79.1 C80.1 C81.1 C82.1 C83.1 C84.1 C85.1 C86.1 C91.2 C92.2 IC1.4 IC1.8 IC1.11 IC1.15 IC1.17 IC1.21 IC1.28 IC1.43 IC1.44 IC1.45 IC2.17 IC2.30 IC2.32 IC2.33 IC2.39 IC2.52 IC2.62 IC2.72 IC2.84 IC2.95 IC2.108 IC2.121 IC2.131 IC2.144 IC3.17 IC3.30 IC3.32 IC3.33 IC3.39 IC3.52 IC3.62 IC3.72 IC3.84 IC3.95 IC3.108 IC3.121 IC3.131 IC3.144 IC4.17 IC4.30 IC4.32 IC4.33 IC4.39 IC4.52 IC4.62 IC4.72 IC4.84 IC4.95 IC4.108 IC4.121 IC4.131 IC4.144 IC5.17 IC5.30 IC5.32 IC5.33 IC5.39 IC5.52 IC5.62 IC5.72 IC5.84 IC5.95 IC5.108 IC5.121 IC5.131 IC5.144 IC6.17 IC6.30 IC6.32 IC6.33 IC6.39 IC6.52 IC6.62 IC6.72 IC6.84 IC6.95 IC6.108 IC6.121 IC6.131 IC6.144 IC7.17 IC7.30 IC7.32 IC7.33 IC7.39 IC7.52 IC7.62 IC7.72 IC7.84 IC7.95 IC7.108 IC7.121 IC7.131 IC7.144 IC8.3 IC9.3 IC10.3 IC11.3 J1.10 J1.12 P2.3 P3.3 P9.1 PS1.6 R6.2 R7.2 R8.2 R12.2 R15.2 R26.2 R37.1 R38.1 R39.2 S3.3 S3.4
ACTLED: IC1.27 R25.2
DQ1: IC2.10 IC8.2
DQ2: IC2.11 IC9.2
DQ3: IC2.12 IC10.2
DQ4: IC2.13 IC11.2
GND: C1.2 C2.1 C5.1 C6.1 C7.2 C8.1 C9.2 C10.2 C11.2 C12.2 C13.2 C14.2 C15.2 C16.2 C17.2 C18.2 C19.2 C20.2 C21.2 C22.2 C23.2 C24.2 C25.2 C26.2 C27.2 C28.2 C29.2 C30.2 C31.2 C32.2 C33.2 C34.2 C35.2 C36.2 C37.2 C38.2 C39.2 C40.2 C41.2 C42.2 C43.2 C44.2 C45.2 C46.2 C47.2 C48.2 C49.2 C50.2 C51.2 C52.2 C53.2 C54.2 C55.2 C56.2 C57.2 C58.2 C59.2 C60.2 C61.2 C62.2 C63.2 C64.2 C65.2 C66.2 C67.2 C68.2 C69.2 C70.2 C71.2 C72.2 C73.2 C74.2 C75.2 C76.2 C77.2 C78.2 C79.2 C80.2 C81.2 C82.2 C83.2 C84.2 C85.2 C86.2 C87.2 C88.2 IC1.3 IC1.9 IC1.29 IC1.48 IC2.16 IC2.31 IC2.38 IC2.51 IC2.61 IC2.83 IC2.94 IC2.107 IC2.120 IC2.130 IC3.16 IC3.31 IC3.38 IC3.51 IC3.61 IC3.83 IC3.94 IC3.107 IC3.120 IC3.130 IC4.16 IC4.31 IC4.38 IC4.51 IC4.61 IC4.83 IC4.94 IC4.107 IC4.120 IC4.130 IC5.16 IC5.31 IC5.38 IC5.51 IC5.61 IC5.83 IC5.94 IC5.107 IC5.120 IC5.130 IC6.16 IC6.31 IC6.38 IC6.51 IC6.61 IC6.83 IC6.94 IC6.107 IC6.120 IC6.130 IC7.16 IC7.31 IC7.38 IC7.51 IC7.61 IC7.83 IC7.94 IC7.107 IC7.120 IC7.130 IC8.1 IC9.1 IC10.1 IC11.1 M1.1 M2.1 M3.1 M4.1 P2.4 P3.4 P4.2 P4.7 P4.10 P4.15 P4.18 P5.2 P5.7 P5.10 P5.15 P5.18 P6.2 P6.7 P6.10 P6.15 P6.18 P7.2 P7.7 P7.10 P7.15 P7.18 P8.2 P8.7 P8.10 P8.15 P8.18 P9.4 R1.2 R2.2 R3.2 R4.2 R5.2 R18.1 R19.1 R27.1 R28.1 R29.1 R30.1 R31.1 R32.2 R33.2 R34.2 R35.2 R36.2 R41.1 R42.2 S1.1 S1.2 S2.1 S2.2
  other v1: 152.4,18.034
LINKLED: IC1.25 R24.2
M_BOOT0: IC2.138 R40.2
M_BOOT1: IC2.48 R42.1
M_NRST: C88.1 IC2.25 R39.1 S2.3 S2.4
M_SPI1_MISO: IC2.42 IC3.42
M_SPI1_MOSI: IC2.43 IC3.43
M_SPI1_SCLK: IC2.41 IC3.41
M_SPI3_MISO: IC2.112 IC4.42
M_SPI3_MOSI: IC2.113 IC4.43
M_SPI3_SCLK: IC2.111 IC4.41
M_SPI4_MISO: IC2.4 IC5.42
M_SPI4_MOSI: IC2.5 IC5.43
M_SPI4_SCLK: IC2.1 IC5.41
M_SPI5_MISO: IC2.20 IC6.42
M_SPI5_MOSI: IC2.21 IC6.43
M_SPI5_SCLK: IC2.19 IC6.41
M_SPI6_MISO: IC2.127 IC7.42
M_SPI6_MOSI: IC2.129 IC7.43
M_SPI6_SCLK: IC2.128 IC7.41
M_SWCLK: IC2.109 P2.1
M_SWDIO: P2.2 R37.2
NetC1_1: C1.1 P1.7 R9.2 R10.2
NetC2_2: C2.2 P1.2 R6.1
NetC3_1: C3.1 R9.1 R14.1
NetC3_2: C3.2 P1.8
NetC4_1: C4.1 R10.1 R16.1
NetC4_2: C4.2 P1.6
NetC7_1: C7.1 IC1.14 IC1.16 IC1.19 IC1.20
NetC8_2: C8.2 R20.1 R21.1 R22.2 R23.2
NetC9_1: C9.1 IC2.23 Y2.1
NetC10_1: C10.1 IC2.24 Y2.2
NetC11_1: C11.1 IC3.23 Y3.1
NetC12_1: C12.1 IC3.24 Y3.2
NetC13_1: C13.1 IC4.23 Y4.1
NetC14_1: C14.1 IC4.24 Y4.2
NetC15_1: C15.1 IC5.23 Y5.1
NetC16_1: C16.1 IC5.24 Y5.2
NetC17_1: C17.1 IC6.23 Y6.1
NetC18_1: C18.1 IC6.24 Y6.2
NetC19_1: C19.1 IC7.23 Y7.1
NetC20_1: C20.1 IC7.24 Y7.2
NetC89_1: C89.1 C90.1 C91.1 P10.2 PS1.1
NetC89_2: C89.2 PS1.7
NetC90_2: C90.2 C92.1 L1.2 PS1.2
NetIC1_10: IC1.10 R18.2
NetIC1_22: IC1.22 R19.2
NetIC1_38: IC1.38 R5.1
NetIC1_39: IC1.39 R4.1
NetIC1_40: IC1.40 R3.1
NetIC1_41: IC1.41 R2.1
NetIC1_42: IC1.42 R1.1
NetJ1_1: J1.1 P1.16
NetJ1_2: J1.2 P1.14
NetJ1_3: J1.3 P1.11
NetJ1_4: J1.4 J1.5 R22.1
NetJ1_6: J1.6 P1.9
NetJ1_7: J1.7 J1.8 R23.1
NetJ1_9: J1.9 R24.1
NetJ1_11: J1.11 R25.1
NetL1_1: L1.1 P10.1
NetP1_1: P1.1 R8.1 R13.1
NetP1_3: P1.3 R7.1 R11.1
NetP1_10: P1.10 R21.2
NetP1_15: P1.15 R20.2
NetR40_1: R40.1 R41.2 S3.1 S3.2
RXN: IC1.5 R14.2
RXP: IC1.6 R16.2
S2_BOOT0: IC3.138 R27.2
S2_BOOT1: IC3.48 R32.1
S2_NRST: C87.1 IC3.25 IC4.25 IC5.25 IC6.25 IC7.25 R26.1 S1.3 S1.4
S2_SPI2_MISO: IC3.28 P4.3
S2_SPI2_MOSI: IC3.29 P4.5
S2_SPI2_SCLK: IC3.69 P4.1
S2_SPI3_MISO: IC3.112 P4.11
S2_SPI3_MOSI: IC3.113 P4.13
S2_SPI3_SCLK: IC3.111 P4.9
S2_SPI4_MISO: IC3.4 P4.19
S2_SPI4_MOSI: IC3.5 P4.20
S2_SPI4_SCLK: IC3.1 P4.17
S2_SPI5_MISO: IC3.20 P4.14
S2_SPI5_MOSI: IC3.21 P4.16
S2_SPI5_SCLK: IC3.19 P4.12
S2_SPI6_MISO: IC3.127 P4.6
S2_SPI6_MOSI: IC3.129 P4.8
S2_SPI6_SCLK: IC3.128 P4.4
S2_SWCLK: IC3.109 IC4.109 IC5.109 IC6.109 IC7.109 P3.1
S2_SWDIO: IC3.105 IC4.105 IC5.105 IC6.105 IC7.105 P3.2 R38.2
S3_BOOT0: IC4.138 R28.2
S3_BOOT1: IC4.48 R33.1
S3_SPI2_MISO: IC4.28 P5.3
S3_SPI2_MOSI: IC4.29 P5.5
S3_SPI2_SCLK: IC4.69 P5.1
S3_SPI3_MISO: IC4.112 P5.11
S3_SPI3_MOSI: IC4.113 P5.13
S3_SPI3_SCLK: IC4.111 P5.9
S3_SPI4_MISO: IC4.4 P5.19
S3_SPI4_MOSI: IC4.5 P5.20
S3_SPI4_SCLK: IC4.1 P5.17
S3_SPI5_MISO: IC4.20 P5.14
S3_SPI5_MOSI: IC4.21 P5.16
S3_SPI5_SCLK: IC4.19 P5.12
S3_SPI6_MISO: IC4.127 P5.6
S3_SPI6_MOSI: IC4.129 P5.8
S3_SPI6_SCLK: IC4.128 P5.4
S4_BOOT0: IC5.138 R29.2
S4_BOOT1: IC5.48 R34.1
S4_SPI2_MISO: IC5.28 P6.3
S4_SPI2_MOSI: IC5.29 P6.5
S4_SPI2_SCLK: IC5.69 P6.1
S4_SPI3_MISO: IC5.112 P6.11
S4_SPI3_MOSI: IC5.113 P6.13
S4_SPI3_SCLK: IC5.111 P6.9
S4_SPI4_MISO: IC5.4 P6.19
S4_SPI4_MOSI: IC5.5 P6.20
S4_SPI4_SCLK: IC5.1 P6.17
S4_SPI5_MISO: IC5.20 P6.14
S4_SPI5_MOSI: IC5.21 P6.16
S4_SPI5_SCLK: IC5.19 P6.12
S4_SPI6_MISO: IC5.127 P6.6
S4_SPI6_MOSI: IC5.129 P6.8
S4_SPI6_SCLK: IC5.128 P6.4
S5_BOOT0: IC6.138 R30.2
S5_BOOT1: IC6.48 R35.1
S5_SPI2_MISO: IC6.28 P7.3
S5_SPI2_MOSI: IC6.29 P7.5
S5_SPI2_SCLK: IC6.69 P7.1
S5_SPI3_MISO: IC6.112 P7.11
S5_SPI3_MOSI: IC6.113 P7.13
S5_SPI3_SCLK: IC6.111 P7.9
S5_SPI4_MISO: IC6.4 P7.19
S5_SPI4_MOSI: IC6.5 P7.20
S5_SPI4_SCLK: IC6.1 P7.17
S5_SPI5_MISO: IC6.20 P7.14
S5_SPI5_MOSI: IC6.21 P7.16
S5_SPI5_SCLK: IC6.19 P7.12
S5_SPI6_MISO: IC6.127 P7.6
S5_SPI6_MOSI: IC6.129 P7.8
S5_SPI6_SCLK: IC6.128 P7.4
S6_BOOT0: IC7.138 R31.2
S6_BOOT1: IC7.48 R36.1
S6_SPI2_MISO: IC7.28 P8.3
S6_SPI2_MOSI: IC7.29 P8.5
S6_SPI2_SCLK: IC7.69 P8.1
S6_SPI3_MISO: IC7.112 P8.11
S6_SPI3_MOSI: IC7.113 P8.13
S6_SPI3_SCLK: IC7.111 P8.9
S6_SPI4_MISO: IC7.4 P8.19
S6_SPI4_MOSI: IC7.5 P8.20
S6_SPI4_SCLK: IC7.1 P8.17
S6_SPI5_MISO: IC7.20 P8.14
S6_SPI5_MOSI: IC7.21 P8.16
S6_SPI5_SCLK: IC7.19 P8.12
S6_SPI6_MISO: IC7.127 P8.6
S6_SPI6_MOSI: IC7.129 P8.8
S6_SPI6_SCLK: IC7.128 P8.4
SW_MISO: IC2.8 P11.2
SW_MOSI: IC2.9 P11.3
SW_RESET: IC2.2 IC3.2 IC4.2 IC5.2 IC6.2 IC7.2 P11.4
SW_SCLK: IC2.7 P11.1
TXN: IC1.1 R11.2
TXP: IC1.2 R13.2
USART1_RX: IC2.102 P9.2
USART1_TX: IC2.101 P9.3
W5500_INT: IC1.36 IC2.47 R12.1
W5500_RST: IC1.37 IC2.46
W5500_SCS: IC1.32 IC2.70 R15.1
W5500_SPI2_MISO: IC1.34 IC2.28
W5500_SPI2_MOSI: IC1.35 IC2.29
W5500_SPI2_SCLK: IC1.33 IC2.69
XI: C5.2 IC1.30 R17.1 Y1.2
XO: C6.2 IC1.31 R17.2 Y1.1
pads on no net: IC1.7 IC1.12 IC1.13 IC1.18 IC1.23 IC1.24 IC1.26 IC1.46 IC1.47 IC2.3 IC2.6 IC2.14 IC2.15 IC2.18 IC2.22 IC2.26 IC2.27 IC2.34 IC2.35 IC2.36 IC2.37 IC2.40 IC2.44 IC2.45 IC2.49 IC2.50 IC2.53 IC2.54 IC2.55 IC2.56 IC2.57 IC2.58 IC2.59 IC2.60 IC2.63 IC2.64 IC2.65 IC2.66 IC2.67 IC2.68 IC2.71 IC2.73 IC2.74 IC2.75 IC2.76 IC2.77 IC2.78 IC2.79 IC2.80 IC2.81 IC2.82 IC2.85 IC2.86 IC2.87 IC2.88 IC2.89 IC2.90 IC2.91 IC2.92 IC2.93 IC2.96 IC2.97 IC2.98 IC2.99 IC2.100 IC2.103 IC2.104 IC2.105 IC2.106 IC2.110 IC2.114 IC2.115 IC2.116 IC2.117 IC2.118 IC2.119 IC2.122 IC2.123 IC2.124 IC2.125 IC2.126 IC2.132 IC2.133 IC2.134 IC2.135 IC2.136 IC2.137 IC2.139 IC2.140 IC2.141 IC2.142 IC2.143 IC3.3 IC3.6 IC3.7 IC3.8 IC3.9 IC3.10 IC3.11 IC3.12 IC3.13 IC3.14 IC3.15 IC3.18 IC3.22 IC3.26 IC3.27 IC3.34 IC3.35 IC3.36 IC3.37 IC3.40 IC3.44 IC3.45 IC3.46 IC3.47 IC3.49 IC3.50 IC3.53 IC3.54 IC3.55 IC3.56 IC3.57 IC3.58 IC3.59 IC3.60 IC3.63 IC3.64 IC3.65 IC3.66 IC3.67 IC3.68 IC3.70 IC3.71 IC3.73 IC3.74 IC3.75 IC3.76 IC3.77 IC3.78 IC3.79 IC3.80 IC3.81 IC3.82 IC3.85 IC3.86 IC3.87 IC3.88 IC3.89 IC3.90 IC3.91 IC3.92 IC3.93 IC3.96 IC3.97 IC3.98 IC3.99 IC3.100 IC3.101 IC3.102 IC3.103 IC3.104 IC3.106 IC3.110 IC3.114 IC3.115 IC3.116 IC3.117 IC3.118 IC3.119 IC3.122 IC3.123 IC3.124 IC3.125 IC3.126 IC3.132 IC3.133 IC3.134 IC3.135 IC3.136 IC3.137 IC3.139 IC3.140 IC3.141 IC3.142 IC3.143 IC4.3 IC4.6 IC4.7 IC4.8 IC4.9 IC4.10 IC4.11 IC4.12 IC4.13 IC4.14 IC4.15 IC4.18 IC4.22 IC4.26 IC4.27 IC4.34 IC4.35 IC4.36 IC4.37 IC4.40 IC4.44 IC4.45 IC4.46 IC4.47 IC4.49 IC4.50 IC4.53 IC4.54 IC4.55 IC4.56 IC4.57 IC4.58 IC4.59 IC4.60 IC4.63 IC4.64 IC4.65 IC4.66 IC4.67 IC4.68 IC4.70 IC4.71 IC4.73 IC4.74 IC4.75 IC4.76 IC4.77 IC4.78 IC4.79 IC4.80 IC4.81 IC4.82 IC4.85 IC4.86 IC4.87 IC4.88 IC4.89 IC4.90 IC4.91 IC4.92 IC4.93 IC4.96 IC4.97 IC4.98 IC4.99 IC4.100 IC4.101 IC4.102 IC4.103 IC4.104 IC4.106 IC4.110 IC4.114 IC4.115 IC4.116 IC4.117 IC4.118 IC4.119 IC4.122 IC4.123 IC4.124 IC4.125 IC4.126 IC4.132 IC4.133 IC4.134 IC4.135 IC4.136 IC4.137 IC4.139 IC4.140 IC4.141 IC4.142 IC4.143 IC5.3 IC5.6 IC5.7 IC5.8 IC5.9 IC5.10 IC5.11 IC5.12 IC5.13 IC5.14 IC5.15 IC5.18 IC5.22 IC5.26 IC5.27 IC5.34 IC5.35 IC5.36 IC5.37 IC5.40 IC5.44 IC5.45 IC5.46 IC5.47 IC5.49 IC5.50 IC5.53 IC5.54 IC5.55 IC5.56 IC5.57 IC5.58 IC5.59 IC5.60 IC5.63 IC5.64 IC5.65 IC5.66 IC5.67 IC5.68 IC5.70 IC5.71 IC5.73 IC5.74 IC5.75 IC5.76 IC5.77 IC5.78 IC5.79 IC5.80 IC5.81 IC5.82 IC5.85 IC5.86 IC5.87 IC5.88 IC5.89 IC5.90 IC5.91 IC5.92 IC5.93 IC5.96 IC5.97 IC5.98 IC5.99 IC5.100 IC5.101 IC5.102 IC5.103 IC5.104 IC5.106 IC5.110 IC5.114 IC5.115 IC5.116 IC5.117 IC5.118 IC5.119 IC5.122 IC5.123 IC5.124 IC5.125 IC5.126 IC5.132 IC5.133 IC5.134 IC5.135 IC5.136 IC5.137 IC5.139 IC5.140 IC5.141 IC5.142 IC5.143 IC6.3 IC6.6 IC6.7 IC6.8 IC6.9 IC6.10 IC6.11 IC6.12 IC6.13 IC6.14 IC6.15 IC6.18 IC6.22 IC6.26 IC6.27 IC6.34 IC6.35 IC6.36 IC6.37 IC6.40 IC6.44 IC6.45 IC6.46 IC6.47 IC6.49 IC6.50 IC6.53 IC6.54 IC6.55 IC6.56 IC6.57 IC6.58 IC6.59 IC6.60 IC6.63 IC6.64 IC6.65 IC6.66 IC6.67 IC6.68 IC6.70 IC6.71 IC6.73 IC6.74 IC6.75 IC6.76 IC6.77 IC6.78 IC6.79 IC6.80 IC6.81 IC6.82 IC6.85 IC6.86 IC6.87 IC6.88 IC6.89 IC6.90 IC6.91 IC6.92 IC6.93 IC6.96 IC6.97 IC6.98 IC6.99 IC6.100 IC6.101 IC6.102 IC6.103 IC6.104 IC6.106 IC6.110 IC6.114 IC6.115 IC6.116 IC6.117 IC6.118 IC6.119 IC6.122 IC6.123 IC6.124 IC6.125 IC6.126 IC6.132 IC6.133 IC6.134 IC6.135 IC6.136 IC6.137 IC6.139 IC6.140 IC6.141 IC6.142 IC6.143 IC7.3 IC7.6 IC7.7 IC7.8 IC7.9 IC7.10 IC7.11 IC7.12 IC7.13 IC7.14 IC7.15 IC7.18 IC7.22 IC7.26 IC7.27 IC7.34 IC7.35 IC7.36 IC7.37 IC7.40 IC7.44 IC7.45 IC7.46 IC7.47 IC7.49 IC7.50 IC7.53 IC7.54 IC7.55 IC7.56 IC7.57 IC7.58 IC7.59 IC7.60 IC7.63 IC7.64 IC7.65 IC7.66 IC7.67 IC7.68 IC7.70 IC7.71 IC7.73 IC7.74 IC7.75 IC7.76 IC7.77 IC7.78 IC7.79 IC7.80 IC7.81 IC7.82 IC7.85 IC7.86 IC7.87 IC7.88 IC7.89 IC7.90 IC7.91 IC7.92 IC7.93 IC7.96 IC7.97 IC7.98 IC7.99 IC7.100 IC7.101 IC7.102 IC7.103 IC7.104 IC7.106 IC7.110 IC7.114 IC7.115 IC7.116 IC7.117 IC7.118 IC7.119 IC7.122 IC7.123 IC7.124 IC7.125 IC7.126 IC7.132 IC7.133 IC7.134 IC7.135 IC7.136 IC7.137 IC7.139 IC7.140 IC7.141 IC7.142 IC7.143 IC8.4 IC9.4 IC10.4 IC11.4 J1.MH1 J1.MH2 J1.MH3 J1.MH4 P1.4 P1.5 P1.12 P1.13 PS1.3 PS1.8 PS1.9 PS1.10
copper on no net: | length 1468.2
  GND2 w0: 1,1 1,99 149,99 149,1 1,1
  GND1 w0: 0.949,1 149,1 149,99 0.949,99 0.949,1
  PWR w0: 2,2 148,2 148,98 147.917,97.917 2.083,97.917 2,98 2,2
  other v1: -9,0 159,0 -9,98 159,98

## Polygon pours and split planes (outlines as drawn)
GND on GND1 "NONET_L-01_P-001" (solid, shelved, pour order 0): 0.949,99 0.949,1 149,1 149,99
GND on GND2 "NONET_L-01_P-001" (solid, shelved, pour order 1): 1,99 1,1 149,1 149,99
3.3V on PWR "NONET_L-01_P-001" (solid, shelved, pour order 2): 2,98 2,2 148,2 148,98 2.166,98 2.083,97.917

## Silkscreen, mask and mechanical layers (free items; w line width, h text height)
Top Overlay:
  text "BOOT" at 51.308,93.345 h1.52
  text "Serlal" at 12.319,93.091 h1.52 r270
  text "M_Reset" at 139.065,85.471 h1.52 r90
  text "M_STlink" at 12.319,81.28 h1.52 r270
  text "S_STlink" at 12.319,69.342 h1.52 r270
  text "S_Reset" at 12.192,57.531 h1.52 r270
  text "Backup" at 138.049,37.338 h1.52 r90
  text "PWR" at 134.493,15.24 h1.52 r90
Mechanical 1:
  lines w0.254: -3.302,1.84 -2.794,0.316 ; -3.302,98.792 -2.794,100.316 ; -3.048,0.316 -2.54,0.316 ; -3.048,100.316 -2.54,100.316 ; -2.794,44.577 -2.794,0.316 ; -2.794,56.054 -2.794,100.316 ; -2.286,1.84 -2.794,0.316 ; -2.286,98.792 -2.794,100.316 ; -0.013,-2.032 -0.013,-1.524 ; 1.511,-2.286 -0.013,-1.778 ; 1.511,-1.27 -0.013,-1.778 ; 69.248,-1.778 -0.013,-1.778 ; 80.726,-1.778 149.987,-1.778 ; 148.463,-2.286 149.987,-1.778 ; 148.463,-1.27 149.987,-1.778 ; 149.987,-2.032 149.987,-1.524 ; 0,0 0,100 150,100 150,0 0,0
  text "100 (mm)" at -1.88,44.831 h1.52 r90
  text "150 (mm)" at 69.502,-2.692 h1.52

## Text inside footprints (layer, text, board x,y; h text height)
M1: Mechanical 12 "1" at 3.81,3.937 h0.64
M2: Mechanical 12 "1" at 145.669,4.064 h0.64
M3: Mechanical 12 "1" at 145.796,96.012 h0.64
M4: Mechanical 12 "1" at 3.683,96.266 h0.64